# Altium PCB 600V_20A_MotorController_V2.0.PcbDoc (part 1 of 2)
Units mil, origin at the board's own origin, x right, y up, seen from the top; angles counter-clockwise.
Board outline 9360 x 6410 mil, 4 copper layers (Top Layer, GND, VCC, Bottom Layer); 277 components, 153 nets, 1032 pads, 389 vias.
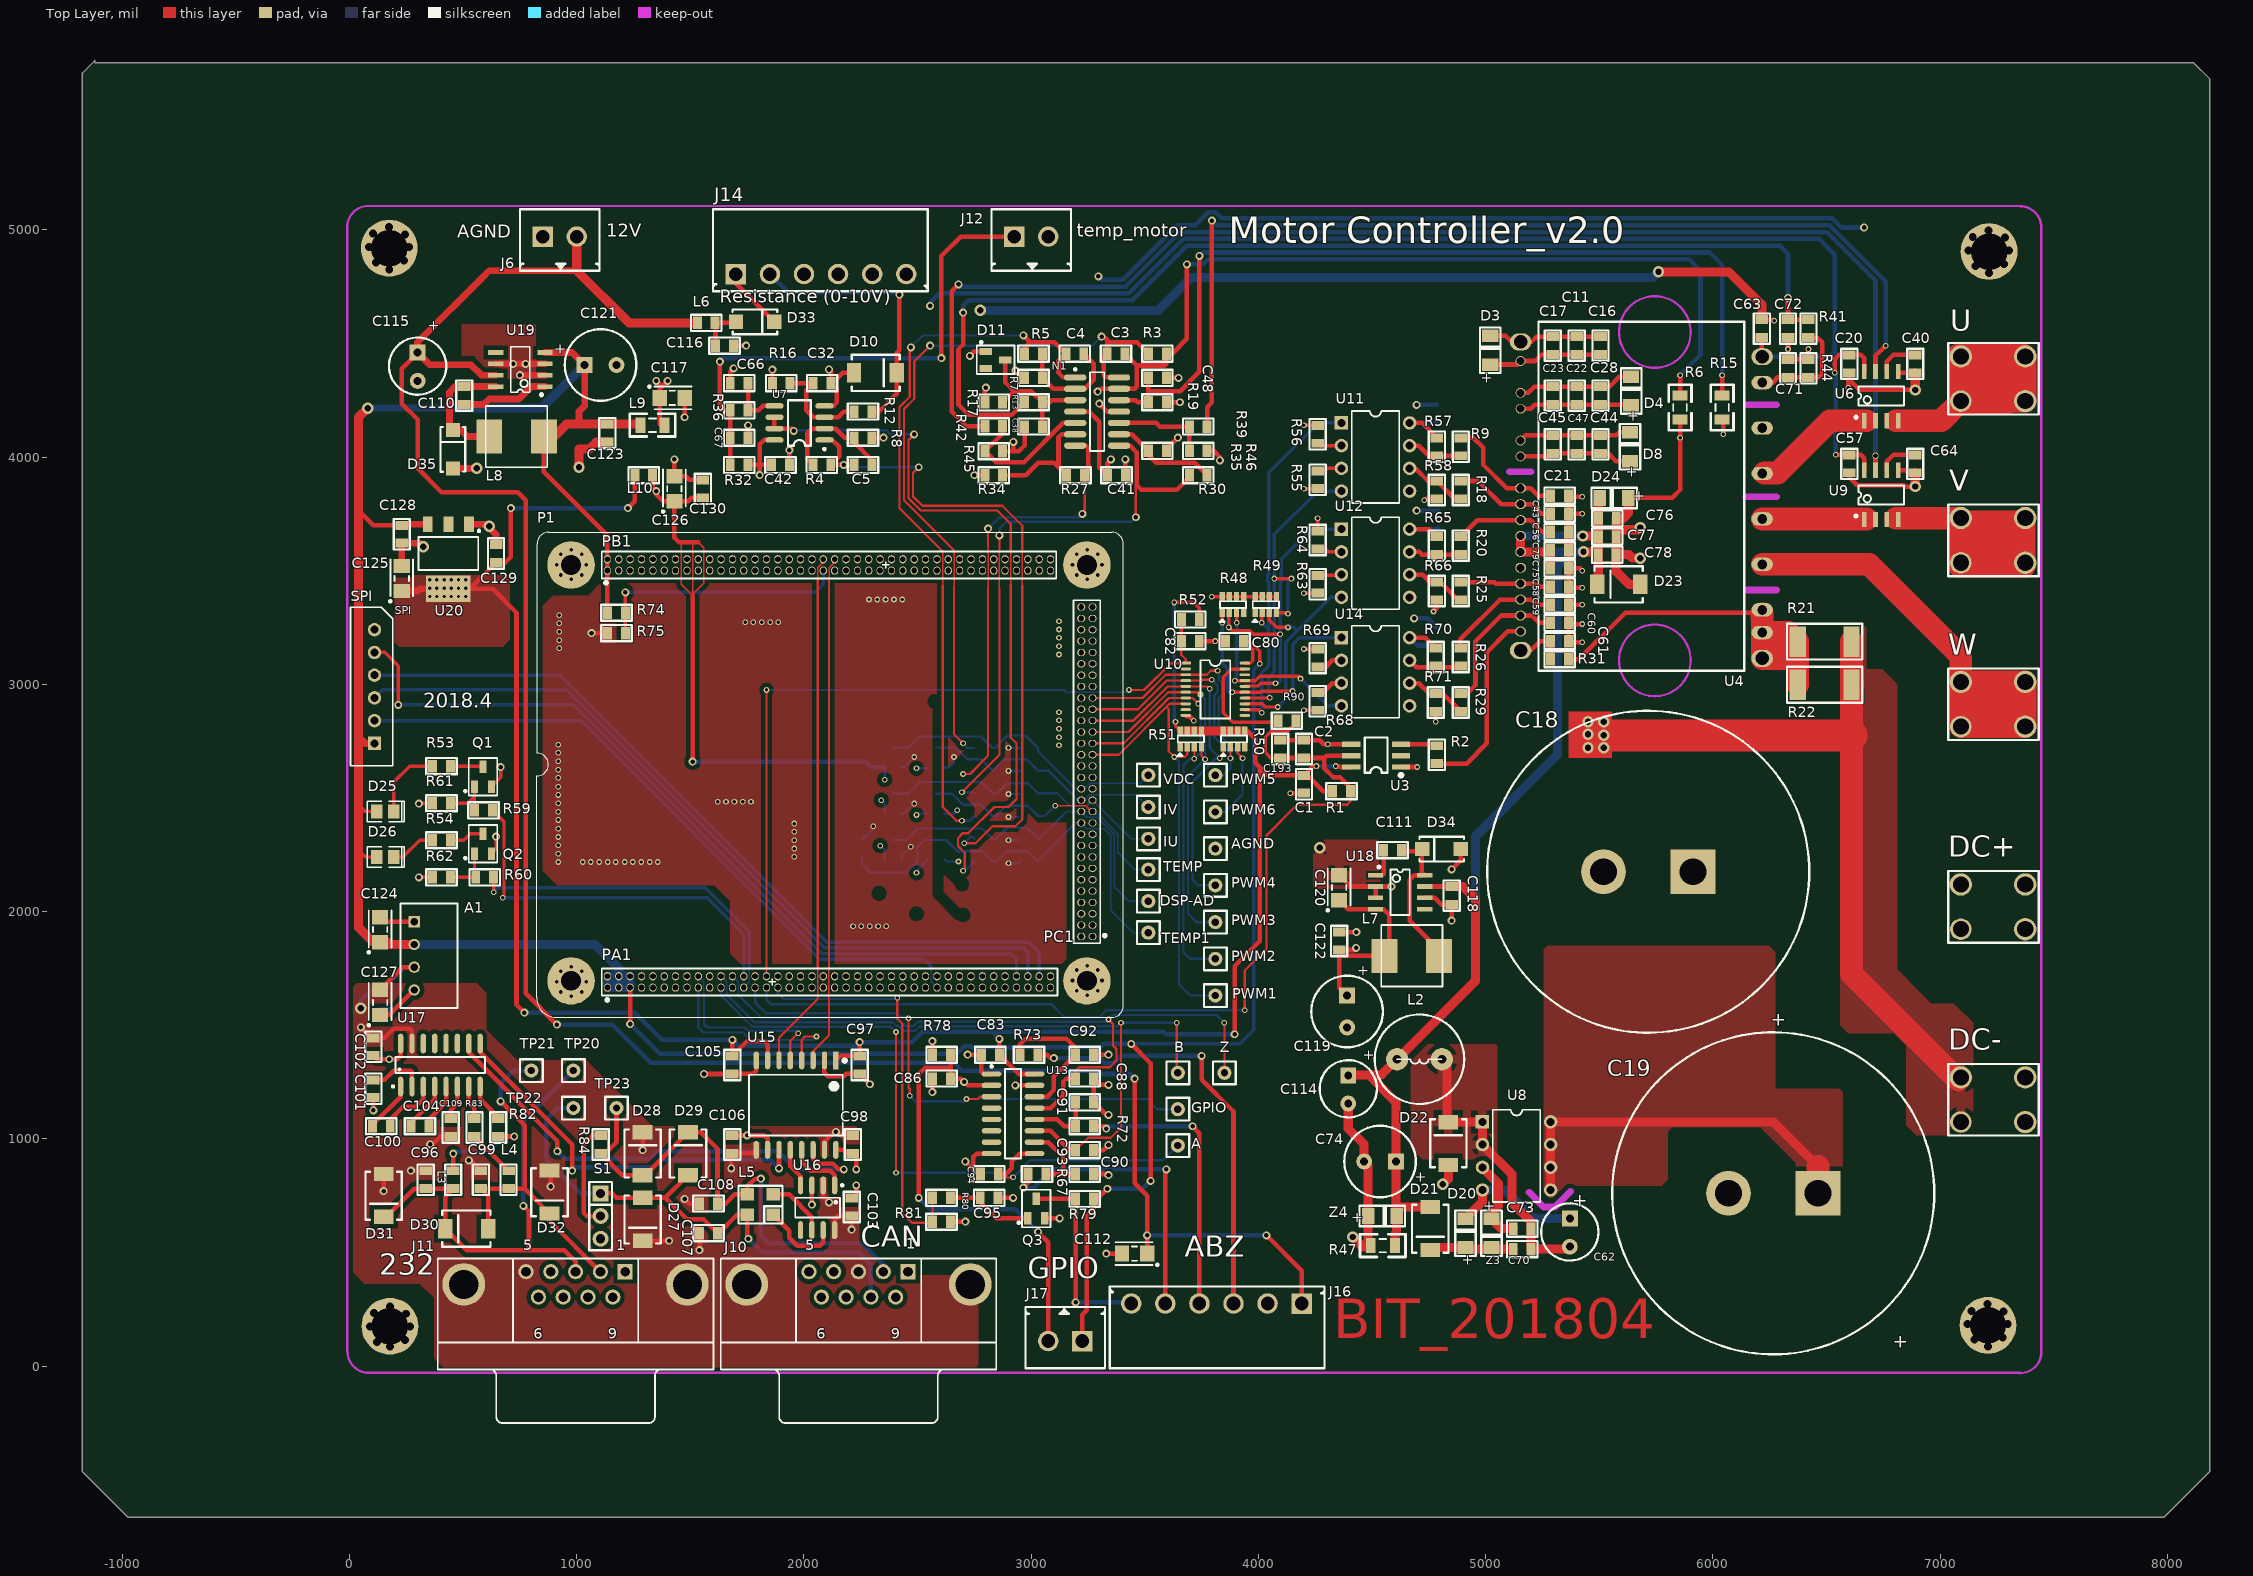
[diagram p0: Top Layer view]
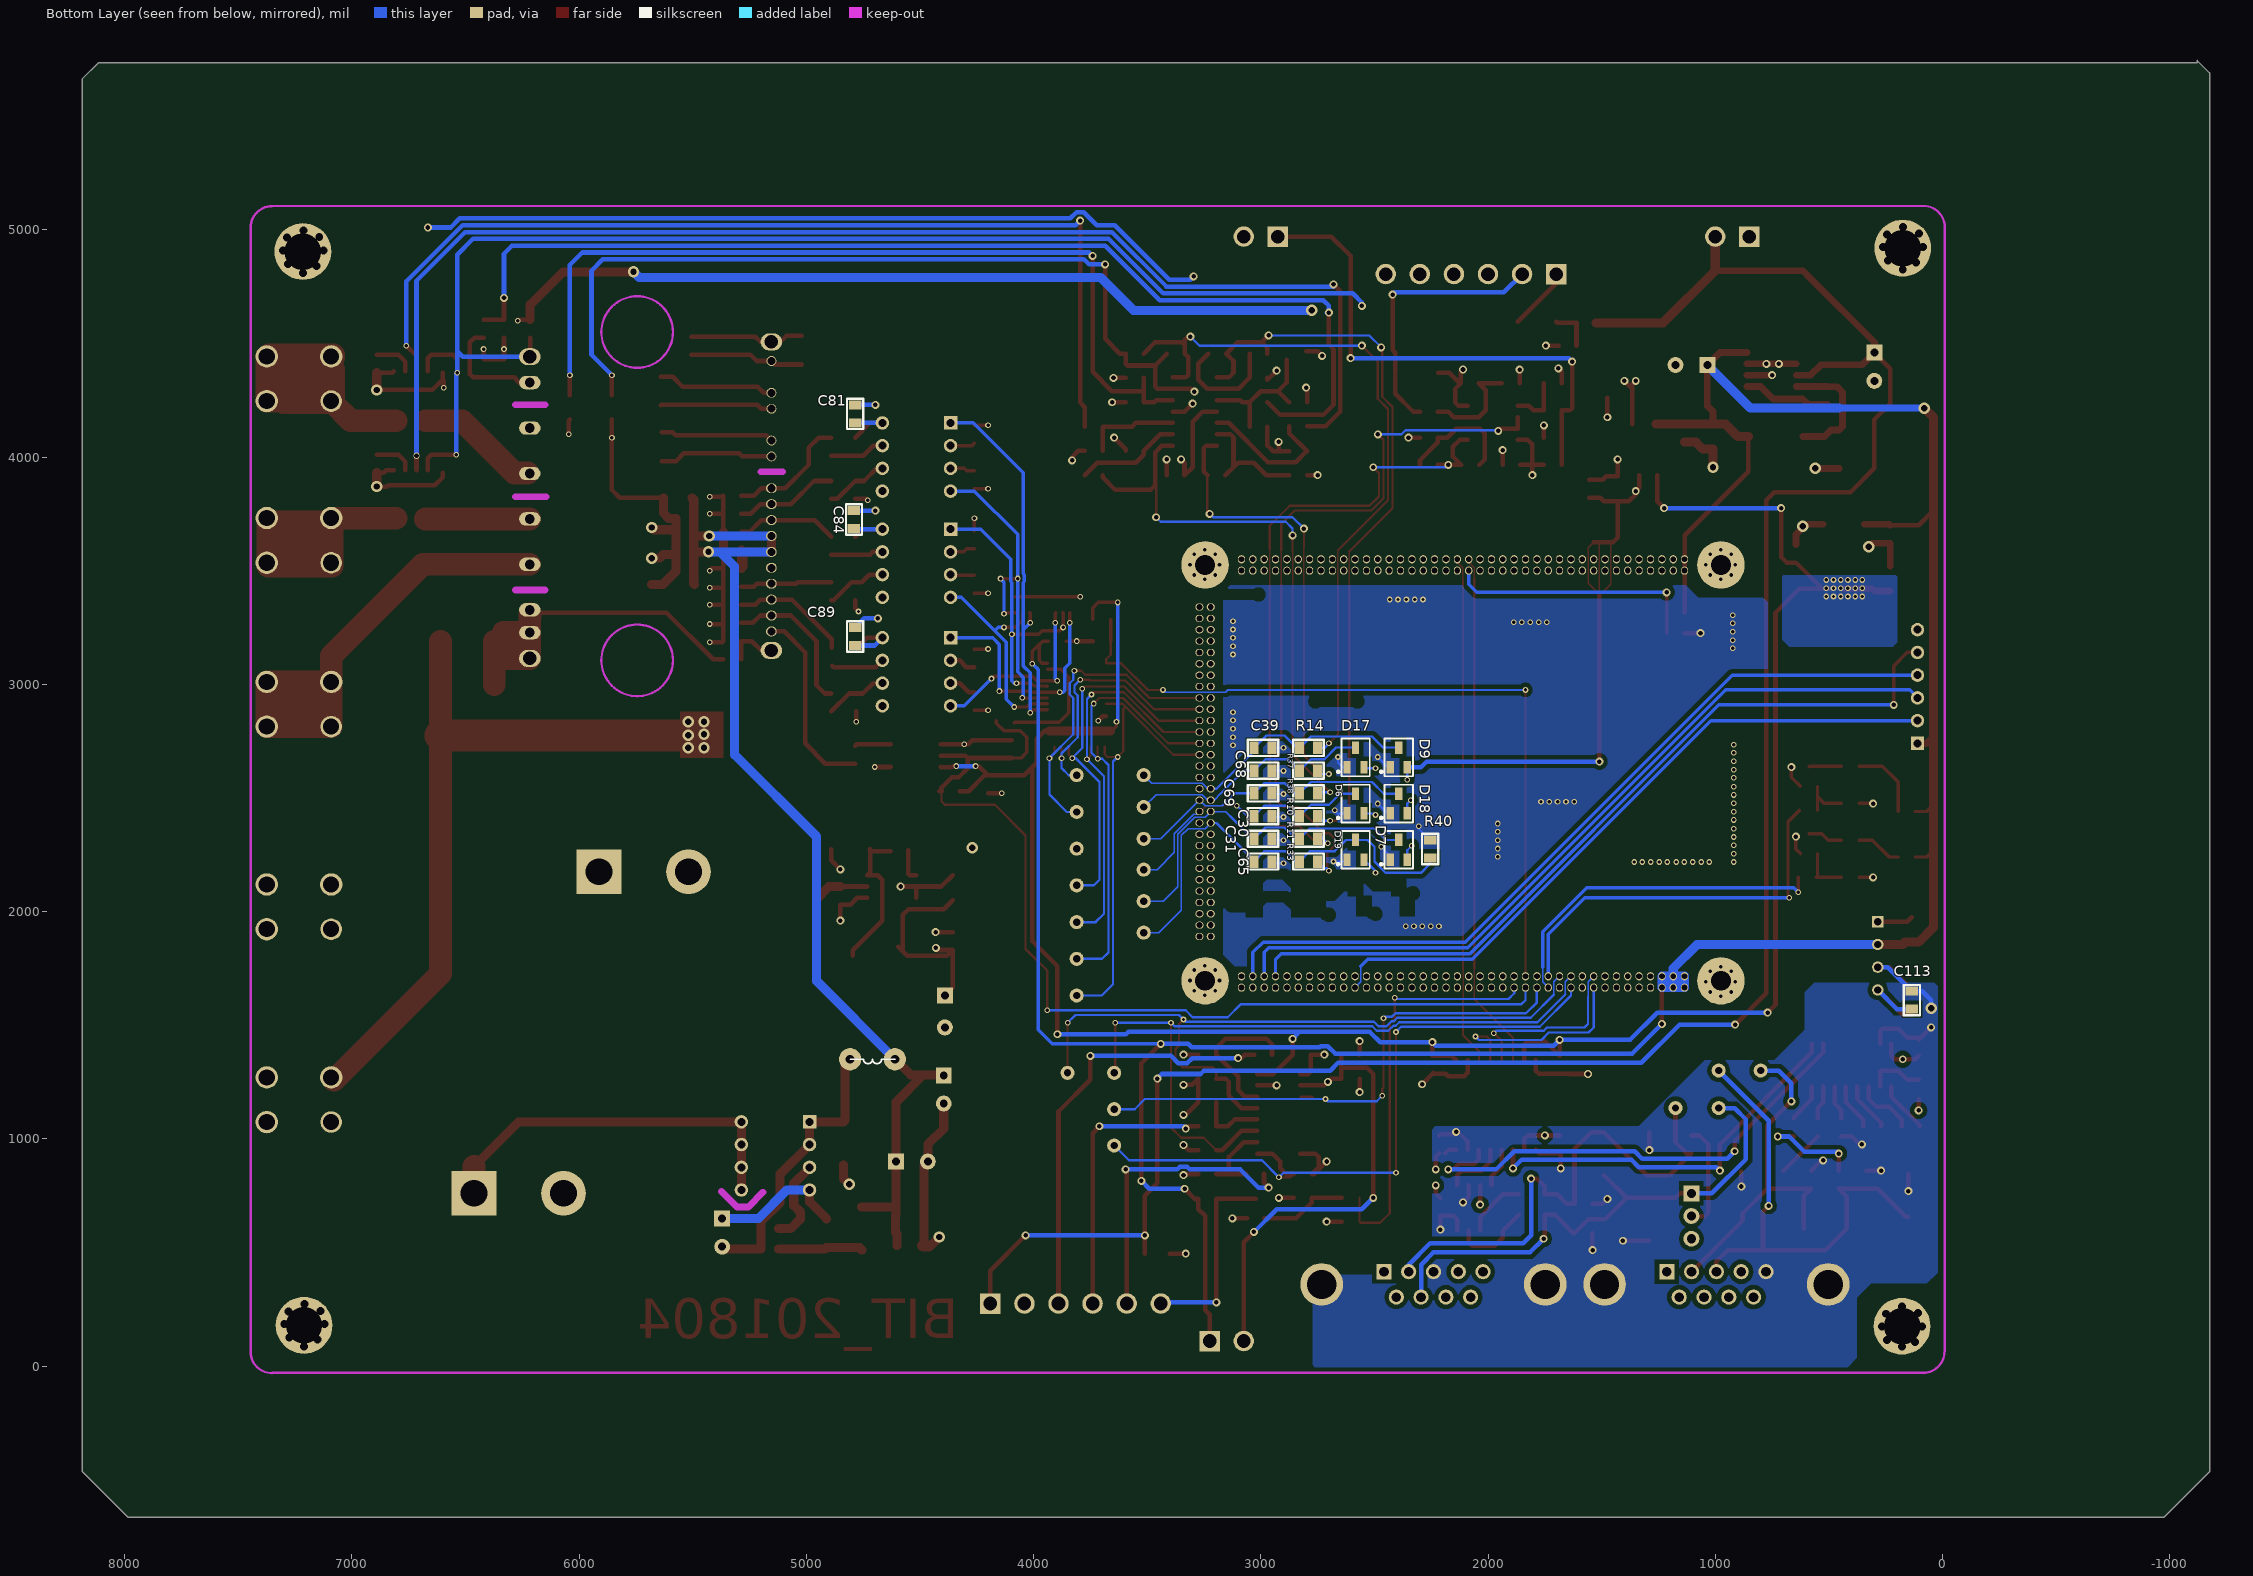
[diagram p1: Bottom Layer view, seen from below]
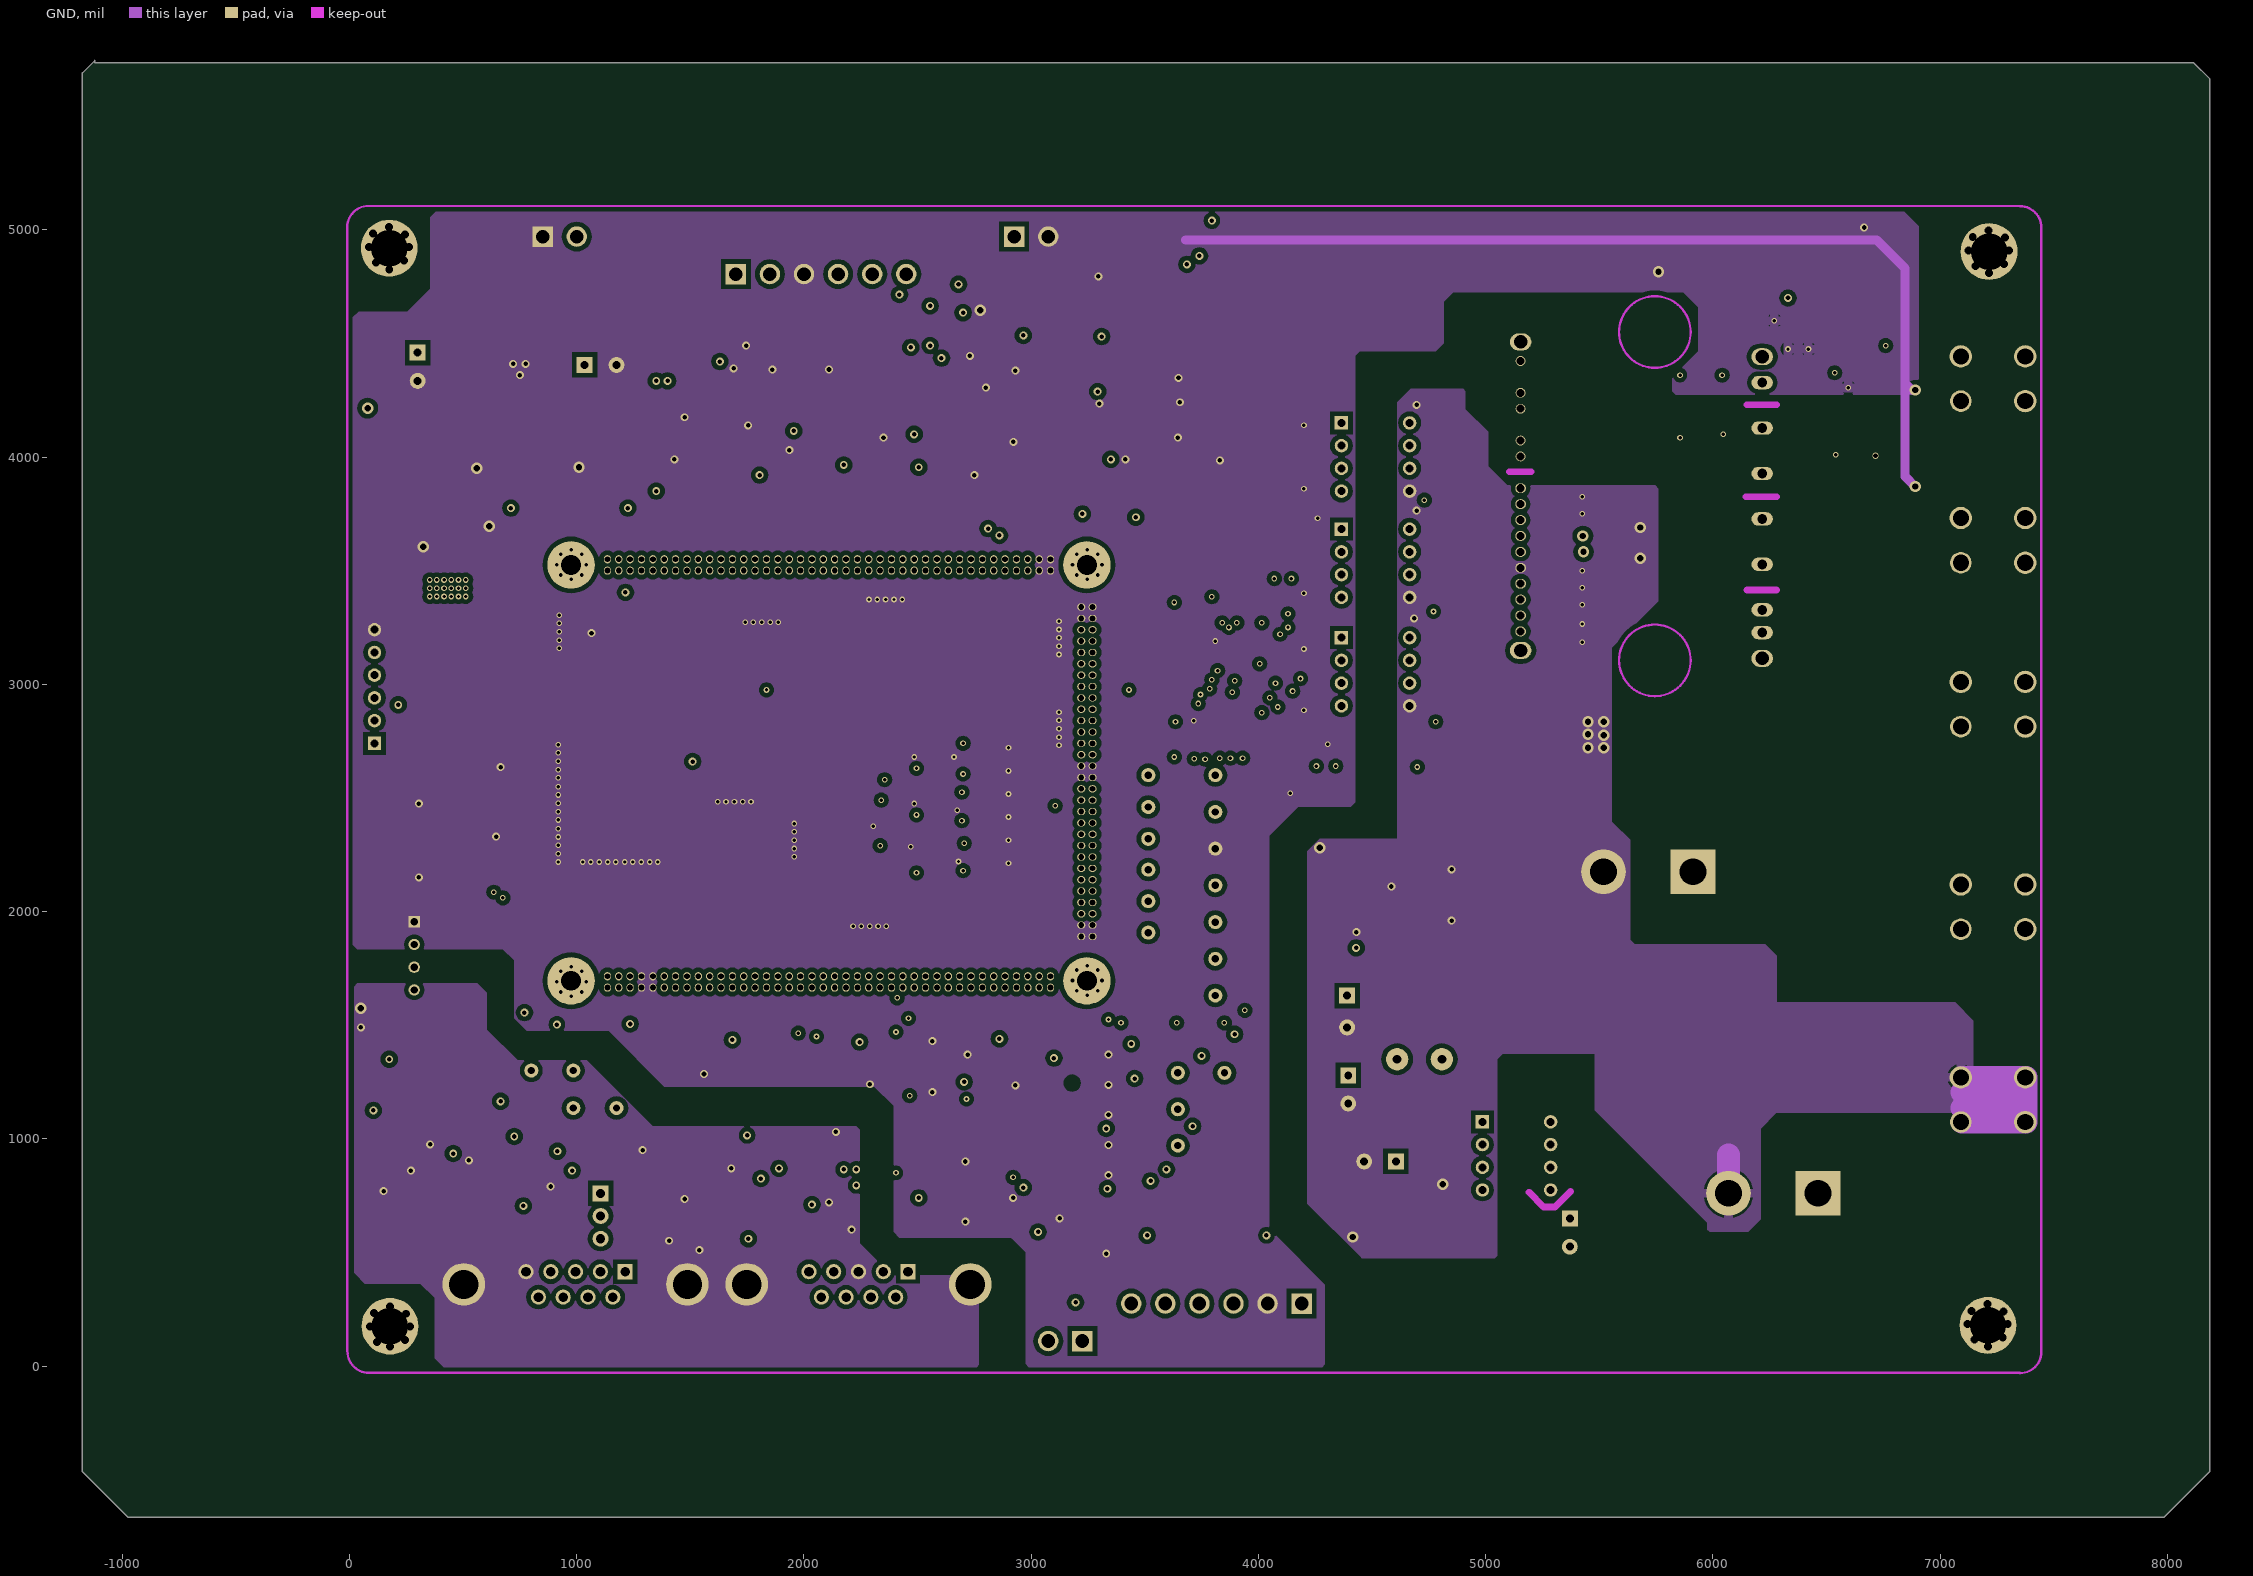
[diagram p2: GND]
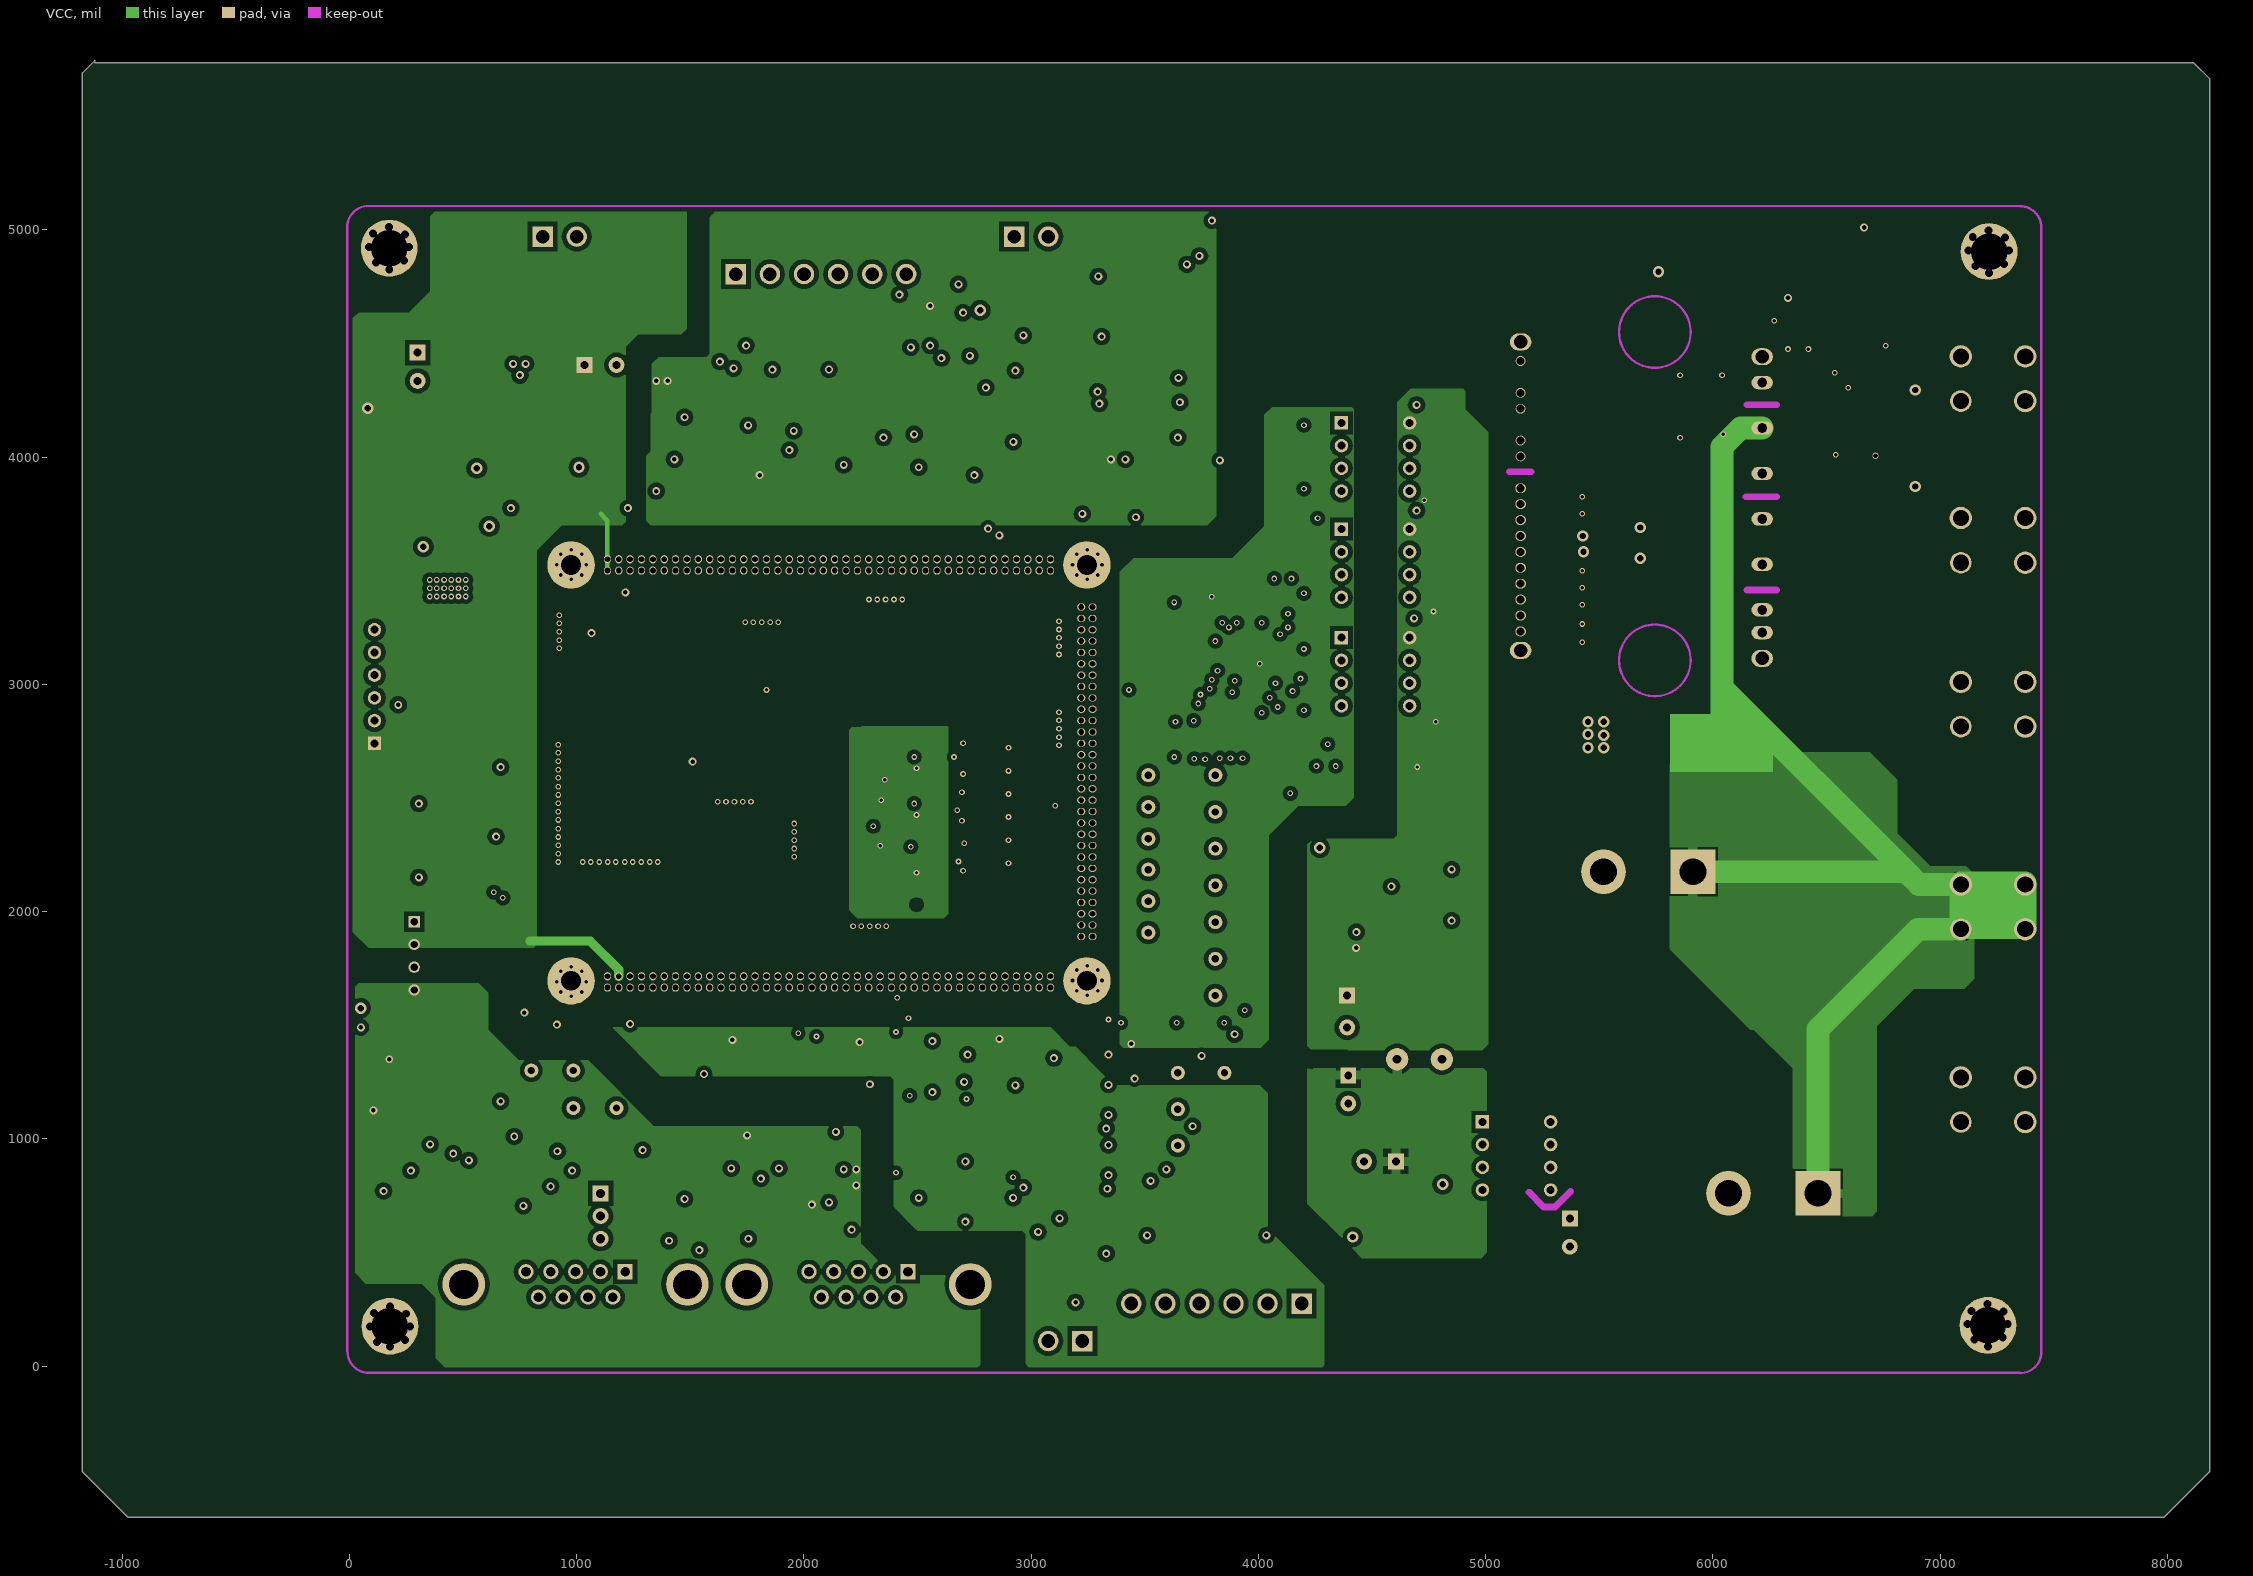
[diagram p3: VCC]

## Layer stack, top to bottom
Top Solder: solder mask 0.4, Solder Resist, Dk 3.5
Top Layer: signal copper 1.4
Dielectric1: core 12.6, FR-4, Dk 4.8
GND: signal copper 1.4
Dielectric2: prepreg 12.6, FR-4, Dk 4.8
VCC: signal copper 1.4
Dielectric3: core 12.6, FR-4, Dk 4.8
Bottom Layer: signal copper 1.4
Bottom Solder: solder mask 0.4, Solder Resist, Dk 3.5

## Board outline
-1120,5735 8115,5735 8185,5665 8185,-465 7985,-665 -975,-665 -1175,-465 -1175,5690 -1120,5745

## Design rules (kind name [scope] priority, off if disabled: settings)
Clearance [All] p1: gap=20 ignorepadtopadclearanceinfootprint=FALSE except(0: Arc-Hole Track-Hole SMDPad-Hole THPad-Hole Via-Hole Fill-Hole Poly-Hole Region-Hole Text-Hole)
ComponentClearance [All] p1: gap=0 collisioncheckmode=3 verticalgap=0 showdistances=FALSE
MinimumSolderMaskSliver [All] p1: minsoldermaskwidth=0
PlaneConnect [All] p1: planeconnectstyle=Relief reliefexpansion=20 reliefentries=4 reliefconductorwidth=40 reliefairgap=10
PolygonConnect [All] p1: connectstyle=Direct reliefconductorwidth=40 reliefentries=4 polygonreliefangle="90 Angle" airgapwidth=10
RoutingVias [All] p1: holewidth=28 width=50 viastyle="Through Hole" minholewidth=28 minwidth=50 maxholewidth=28 maxwidth=50
SilkToSilkClearance [All] p1: silktosilkclearance=0
SilkToSolderMaskClearance SilkscreenOverComponentPads [IsPad] p1: minsilkscreentomaskgap=0 clearancetoexposedcopper=TRUE
SolderMaskExpansion [All] p1: expansion=4 istentingtop=FALSE
Width Width_7 [All] p1 off: maxlimit=30 minlimit=30 preferedwidth=30
Width Width_6 [All] p2 off: maxlimit=30 minlimit=30 preferedwidth=30
Width Width_5 [All] p3 off: maxlimit=100 minlimit=100 preferedwidth=100
Width Width_4 [All] p4 off: maxlimit=20 minlimit=20 preferedwidth=20
Width Width_3 [All] p5 off: maxlimit=106 minlimit=6 preferedwidth=6
Width Width_2 [All] p6: maxlimit=15 minlimit=15 preferedwidth=15
Width Width_1 [All] p7 off: maxlimit=6 minlimit=6 preferedwidth=6
Width [All] p8 off: maxlimit=40 minlimit=40 preferedwidth=40
25 further rules are at their usual default settings.

## Components (designator, comment, footprint, x,y, rotation, side; value= is the part's Value field where it differs from the comment)
A "IV黄色测试点" TP 3645,970 r90 top (schematic designator TP16)
A1 "B0505S-1W" B0505S-1W 435,1955 r270 top
AGND "AGND 黑色测试点" TP 3810,2276.67 r90 top (schematic designator TP17)
B "IV黄色测试点" TP 3645,1290 r90 top (schematic designator TP18)
C1 "Cap" 0805 4200,2560 r90 top
C2 "104" 0805 4200,2715 r270 top
C3 "102" 0805 3373.33,4455 r180 top
C4 "103" 0805 3191.67,4455 r180 top
C5 "103" 0805 2260,3965 r180 top
C11 "225" 0805 5400,4490 r270 top
C16 "225" 0805 5505,4490 r270 top
C17 "104" 0805 5295,4490 r270 top
C18 "390uF/450V" CAP/30mm 5715,2175 r180 top
C19 "390uF/450V" CAP/30mm 6265,760 r180 top
C20 "104" 0805 6600,4410 r90 top
C21 "101" 0805 5325,3830 r180 top
C22 "225" 0805 5400,4270 r270 top
C23 "225" 0805 5295,4270 r270 top
C28 "104" 0805 5505,4270 r270 top
C30 "102" 0805 2990,2420 r0 bottom
C31 "102" 0805 2990,2320 r0 bottom
C32 "103" 0805 2080,4325 r180 top
C38 "103" 0805 3010,4134 r0 top
C39 "103" 0805 2990,2720 r0 bottom
C40 "102" 0805 6890,4410 r90 top
C41 "104" 0805 3375,3920 r180 top
C42 "104" 0805 1896.67,3965 r180 top
C43 "101" 0805 5325,3750 r180 top
C44 "225" 0805 5505,4055.63 r270 top
C45 "225" 0805 5295,4055.63 r270 top
C47 "104" 0805 5400,4055.63 r270 top
C48 "102" 0805 3555,4348 r180 top
C56 "101" 0805 5325,3670 r180 top
C57 "104" 0805 6600,3970 r90 top
C58 "101" 0805 5325,3430 r180 top
C59 "101" 0805 5325,3350 r180 top
C60 "101" 0805 5325,3270 r180 top
C61 "102" 0805 5325,3190 r180 top
C62 "10uF/35V" "CAP/6.4mm -" 5370,690 r270 top
C63 "104" 0805 6215,4565 r270 top
C64 "102" 0805 6890,3970 r90 top
C65 "102" 0805 2990,2220 r0 bottom
C66 "472" 0805 1715,4325 r0 top
C67 "104" 0805 1715,4085 r180 top
C68 "104" 0805 2990,2620 r0 bottom
C69 "104" 0805 2990,2520 r0 bottom
C70 "104" 0805 5160.47,514.53 r180 top
C71 "105" 0805 6330,4390 r270 top
C72 "104" 0805 6330,4565 r90 top
C73 "223" 0805 5160.47,604.53 r180 top
C74 "470uF/25V" CAP/8mm 4635,900 r180 top
C75 "104" 0805 5325,3510 r0 top
C76 "475" 0805 5535,3730 r180 top
C77 "475" 0805 5535,3650 r180 top
C78 "104" 0805 5534.37,3570.71 r180 top
C79 "104" 0805 5325,3590 r180 top
C80 "104" 0805 3895,3190 r180 top
C81 "Cap Semi" 0805 4785,4190 r90 bottom
C82 "104" 0805 3700,3190 r180 top
C83 "104" 0805 2820,1370 r180 top
C84 "Cap Semi" 0805 4790,3725 r90 bottom
C86 "103" 0805 2605.63,1265 r0 top
C88 "102" 0805 3235,1265 r0 top
C89 "Cap Semi" 0805 4785,3210 r90 bottom
C90 "101" 0805 3235,845 r0 top
C91 "101" 0805 3235,1160 r0 top
C92 "101" 0805 3235,1370 r0 top
C93 "102" 0805 3235,950 r0 top
C94 "102" 0805 2815.42,845 r180 top
C95 "104" 0805 2815,740 r0 top
C96 "331" 0805 335,820 r270 top
C97 "104" 0805 2245,1325 r90 top
C98 "104" 0805 2215,975 r90 top
C99 "331" 0805 578.33,820 r270 top
C100 "104" 0805 140,1055 r180 top
C101 "104" 0805 105,1220 r270 top
C102 "104" 0805 105,1405 r90 top
C103 "104" 0805 2210,700 r90 top
C104 "104" 0805 310,1055 r180 top
C105 "104" 0805 1685,1325 r270 top
C106 "104" 0805 1685,975 r90 top
C107 "101" 0805 1580,585 r0 top
C108 "101" 0805 1580,715 r0 top
C109 "104" 0805 445,1050 r270 top
C110 "0.01uF" 0805 505,4270 r270 top
C111 "0.01uF" 0805 4590,2270 r180 top
C112 "10uf 25V 钽电容" "1206 (钽电容)" 3510,495 r180 top
C113 "104" 0805 135,1610 r270 bottom
C114 "100uf 25V 贴片铝电解" "CAP/6.4mm -" 4395,1320 r270 top
C115 "50uf 25V 贴片铝电解" "CAP/6.4mm -" 300,4500 r270 top
C116 "104" 0805 1650,4490 r180 top
C117 "22uf 16V" "1206 (钽电容)" 1365,4260 r0 top
C118 "104" 0805 4850,2070 r90 top
C119 "330uf 16V 铝电解" CAP/8mm 4390,1660 r270 top
C120 "22uf 16V" "1206 (钽电容)" 4355,2050 r90 top
C121 "100uf 16V 铝电解" CAP/8mm 1005,4405 r0 top
C122 "104" 0805 4355,1870 r270 top
C123 "104" 0805 1135,4105 r90 top
C124 "22uf 16V" "1206 (钽电容)" 135,1865 r90 top
C125 "22uf 16V" "1206 (钽电容)" 230,3410 r90 top
C126 "10uf 6.3V" "1206 (钽电容)" 1430,3805 r90 top
C127 "22uf 16V" "1206 (钽电容)" 135,1545 r90 top
C128 "104" 0805 230,3660 r90 top
C129 "104" 0805 645,3575 r270 top
C130 "104" 0805 1555,3860 r270 top
C193 "104" 0805 4095,2715 r270 top
D3 "ZM4746A" LL4148 5020,4470 r90 top
D4 "ZM4746A" LL4148 5640,4290 r90 top
D6 "BAR43S" SOT-23 2620,2431.67 r180 bottom
D7 "BAR43S" SOT-23 2430,2228.33 r180 bottom
D8 "ZM4746A" LL4148 5635,4045 r90 top
D9 "BAR43S" SOT-23 2430,2635 r180 bottom
D10 "SMBJ12A" DO214AA 2220,4370 r0 top
D11 "MMBZ5226B" SOT-23 2800,4465 r270 top
D17 "BAR43S" SOT-23 2620,2635 r180 bottom
D18 "BAR43S" SOT-23 2430,2431.67 r180 bottom
D19 "BAR43S" SOT-23 2620,2228.33 r180 bottom
D20 "1N4148" LL4148 4910.47,584.53 r90 top
D21 "MURS220T3" DO214AA 4755.47,699.53 r270 top
D22 "MURS220T3" DO214AA 4835.47,884.53 r90 top
D23 "MURS220T3" DO214AA 5680,3440 r180 top
D24 "ZM4746A" LL4148 5565,3820 r180 top
D25 "LEDRED" L0805 120,2440 r180 top
D26 "LEDGREEN" L0805 120,2240 r180 top
D27 "P6KE5.0CA" DO214AA 1290,740 r270 top
D28 "P6KE5.0CA" DO214AA 1290,840 r90 top
D29 "P6KE6.8CA" DO214AA 1490,840 r90 top
D30 "P6KE24CA" DO214AA 610,605 r180 top
D31 "P6KE15CA" DO214AA 150,845 r270 top
D32 "P6KE15CA" DO214AA 880,860 r270 top
D33 "U2D" DO214AC 1700,4595 r0 top
D34 "1N5819 SS14" DO214AC 4890,2275 r180 top
D35 "1N5819 SS14" DO214AC 455,3950 r90 top
DC+ "Header 2" PCB焊接端子 7370,2138.75 r270 top (schematic designator J3)
DC- "Header 2" PCB焊接端子 7370,1290 r270 top (schematic designator J7)
DSP-AD "IV黄色测试点" TP 3515,2045.71 r0 top (schematic designator TP2)
GPIO "IV黄色测试点" TP 3645,1130 r180 top (schematic designator TP13)
IU "IV黄色测试点" TP 3515,2320 r90 top (schematic designator TP6)
IV "IV黄色测试点" TP 3515,2460 r90 top (schematic designator TP5)
J6 "Header 2" 381S-2 850,4970 r0 top
J10 "D Connector 9" DSUB1.385-2H9 2240,-15 r180 top
J11 "D Connector 9" DSUB1.385-2H9 995,-15 r180 top
J12 "Header 2" 381S-2 2925,4970 r0 top
J14 "6 P2.54黑色插针" 381S-6 1700,4880 r0 top
J16 "Header 6" 381S-6 4190,200 r180 top
J17 "Header 2" 381S-2 3225,110 r180 top
L2 "2.2mH工字/3A" L\5\10 4610,1350 r0 top
L3 "MMZ2012R601A" 0805 456.67,820 r90 top
L4 "MMZ2012R601A" 0805 700,820 r90 top
L5 "ACM3225-102-2P" ACM3225 1865,665 r180 top
L6 "BLM21PG221SH1" 0805 1570,4590 r0 top
L7 "330uh" L_7*7 4675,1805 r180 top
L8 "47uh" L_7*7 735,4090 r0 top
L9 "CIB31P310NE" 1206 1280,4140 r0 top
L10 "BLM21PG221SH1" 0805 1295,3920 r0 top
N1 "MCP6024" SOIC14_M 3290,4200 r0 top
P1 "CPU_DSP" DSP_240 3795,1895 r90 top
PWM1 "IV黄色测试点" TP 3810,1630 r180 top (schematic designator TP12)
PWM2 "IV黄色测试点" TP 3810,1791.67 r180 top (schematic designator TP11)
PWM3 "IV黄色测试点" TP 3810,1953.33 r180 top (schematic designator TP10)
PWM4 "IV黄色测试点" TP 3810,2115 r180 top (schematic designator TP9)
PWM5 "IV黄色测试点" TP 3810,2600 r180 top (schematic designator TP8)
PWM6 "IV黄色测试点" TP 3810,2438.33 r90 top (schematic designator TP7)
Q1 "FMMT618TA" SOT-23 550,2550 r0 top
Q2 "FMMT618TA" SOT-23 550,2255 r0 top
Q3 "FMMT618TA" SOT-23 2985,650 r0 top
R1 "681" 0805 4365,2530 r180 top
R2 "681" 0805 4785,2690 r90 top
R3 "1002" 0805 3555,4455 r180 top
R4 "30K" 0805 2078.33,3965 r180 top
R5 "10k" 0805 3010,4455 r0 top
R6 "2004" 1206 5855,4165 r90 top
R7 "10K" 0805 3010,4348 r180 top
R8 "120K" 0805 2260,4085 r0 top
R9 "100R" 0805 4890,4045 r90 top
R10 "470R" 0805 2790,2420 r180 bottom
R11 "100R" 0805 2790,2320 r180 bottom
R12 "120K" 0805 2260,4200 r180 top
R13 "10K" 0805 3010,4241 r0 top
R14 "1k" 0805 2790,2720 r0 bottom
R15 "2004" 1206 6040,4165 r90 top
R16 "30K" 0805 1900,4325 r180 top
R17 "10K" 0805 2835,4240 r180 top
R18 "100R" 0805 4890,3855 r90 top
R19 "1002" 0805 3555,4241 r180 top
R20 "100R" 0805 4890,3610 r90 top
R21 "8mR" 2512 6495,3175 r180 top
R22 "8mR" 2512 6495,2985 r180 top
R25 "100R" 0805 4890,3410 r90 top
R26 "100R" 0805 4890,3120 r90 top
R27 "12k" 0805 3195,3920 r180 top
R29 "100R" 0805 4890,2920 r90 top
R30 "12k" 0805 3735,3920 r0 top
R31 "2k" 0805 5325,3110 r0 top
R32 "4.7K" 0805 1715,3965 r180 top
R33 "470R" 0805 2790,2220 r0 bottom
R34 "20K" 0805 2835,3920 r180 top
R35 "20K" 0805 3555,4027 r0 top
R36 "3.3K" 0805 1715,4205 r0 top
R37 "100R" 0805 2790,2620 r180 bottom
R38 "100R" 0805 2790,2520 r180 bottom
R39 "20K" 0805 3735,4134 r180 top
R40 "470R" 0805 2255,2275 r270 bottom
R41 "1k" 0805 6420,4565 r90 top
R42 "20K" 0805 2835,4135 r0 top
R44 "5.1k" 0805 6420,4390 r270 top
R45 "12K" 0805 2835,4025 r0 top
R46 "12K" 0805 3735,4027 r0 top
R47 "2K" 1206 4600,530 r180 top
R48 "20K(0603*4)" R_NET4 3840,3315 r0 top
R49 "20K(0603*4)" R_NET4 3985,3315 r0 top
R50 "20K(0603*4)" R_NET4 3845,2725 r0 top
R51 "20K(0603*4)" R_NET4 3655,2725 r0 top
R52 "10K" 0805 3700,3285 r0 top
R53 "301R" 0805 405,2640 r180 top
R54 "301R" 0805 405,2313.33 r180 top
R55 "470R" 0805 4260,3900 r270 top
R56 "470R" 0805 4260,4100 r90 top
R57 "750R" 0805 4785,4045 r90 top
R58 "750R" 0805 4785,3855 r270 top
R59 "10K" 0805 590,2445 r0 top
R60 "10K" 0805 595,2150 r0 top
R61 "2K" 0805 405,2476.67 r180 top
R62 "2K" 0805 405,2150 r180 top
R63 "470R" 0805 4260,3440 r270 top
R64 "470R" 0805 4260,3635 r90 top
R65 "750R" 0805 4785,3610 r90 top
R66 "750R" 0805 4785,3410 r270 top
R67 "1K" 0805 3025.21,845 r0 top
R68 "470R" 0805 4260,2925 r270 top
R69 "470R" 0805 4260,3115 r90 top
R70 "750R" 0805 4780,3120 r90 top
R71 "750R" 0805 4780,2920 r270 top
R72 "1K" 0805 3235,1055 r180 top
R73 "1K" 0805 2990,1370 r180 top
R74 "1.69K" 0805 1175,3315 r180 top
R75 "3,.3K" 0805 1175,3225 r0 top
R78 "1K" 0805 2605.63,1370 r0 top
R79 "2.2K" 0805 3235,735 r0 top
R80 "1K" 0805 2605,740 r180 top
R81 "10K" 0805 2605,635 r0 top
R82 "100R" 0805 655,1050 r270 top
R83 "100R" 0805 550,1050 r270 top
R84 "120R" 0805 1105,975 r90 top
R90 "0R" 0805 4125,2840 r180 top
S1 "2.54排针黑色3P" SIP3 1105,760 r270 top
SPI "6 P2.54黑色插针" "6P 100mil" 110,2990 r270 top (schematic designator J15)
TEMP "IV黄色测试点" TP 3515,2184.29 r0 top (schematic designator TP1)
TEMP1 "IV黄色测试点" TP 3515,1907.14 r0 top (schematic designator TP4)
TP20 "IV黄色测试点" TP 985,1300 r270 top
TP21 "IV黄色测试点" TP 800,1300 r270 top
TP22 "IV黄色测试点" TP 985,1135 r270 top
TP23 "IV黄色测试点" TP 1175,1135 r270 top
U "Header 2" PCB焊接端子 7370,4462.5 r270 top (schematic designator J1)
U3 "TLP117" TLP113 4515,2685 r180 top
U4 "FNC42060F" FNC42060F 5685,3810 r180 top
U6 "ACS712" SOIC-8 6665,4160 r90 top
U7 "LMV358" so-8 2090,4075 r180 top
U8 "VIPER22A" DIP8 5135.47,924.53 r270 top
U9 "ACS712" SOIC-8 6665,3725 r90 top
U10 "SN74ABT541BPW" TSSOP-20 3655,3110 r0 top
U11 "HCPL-2630" DIP8 4515,4000 r270 top
U12 "HCPL-2630" DIP8 4515,3532.5 r270 top
U13 "SN74HC365D" D016_N 2920,1110 r0 top
U14 "HCPL-2630" DIP8 4515,3055 r270 top
U15 "ISO7242CDW" SOIC16_L 2140,1345 r270 top
U16 "TJA1050" sot96-1_n 2135,795 r270 top
U17 "MAX232ESE" NSO16_N 225,1230 r90 top
U18 "LM2675" SOIC-8 4515,2160 r0 top
U19 "LM2675" SOIC-8 860,4310 r180 top
U20 "ams1117-3.3" SOT-223 435,3575 r180 top
V "Header 2" PCB焊接端子 7370,3751.25 r270 top (schematic designator J4)
VDC "IV黄色测试点" TP 3515,2600 r0 top (schematic designator TP3)
W "Header 2" PCB焊接端子 7370,3030 r270 top (schematic designator J8)
Z "IV黄色测试点" TP 3850,1290 r90 top (schematic designator TP19)
Z3 "15V -ZM4744" LL4148 5025.47,584.53 r270 top
Z4 "15V-ZM4744" LL4148 4545,660 r0 top

## Footprints (in the part's own frame and the unit in brackets; to place one, negate y for a bottom-side part, rotate by r counter-clockwise, add the part's x,y. Pads: shape width x height; smd on the part's side, far side on the other; paste and mask are expansions set on the pad)
"6P 100mil" [mm]
  rect 1.5x1.5 hole 0.9: 1(6.35,0)
  round 1.5 hole 0.9: 2(3.81,0) 3(1.27,0) 4(-1.27,0) 5(-3.81,0) 6(-6.35,0)
  silkscreen extent -8.86,-2.69 8.86,2.03
381S-2 [mil]
  rect 90x90 hole 60: 1(0,0)
  round 90 hole 60: 2(150,0)
  silkscreen extent -100,-150 250,120
381S-6 [mil]
  rect 90x90 hole 60: 1(0,-75)
  round 90 hole 60: 2(150,-75) 3(300,-75) 4(450,-75) 5(600,-75) 6(750,-75)
  silkscreen extent -100,-150 845,210
0805 [mm]
  rect 1x1.4 smd: 1(-1,0) 2(1,0)
  silkscreen extent -1.7,-0.9 1.7,0.9
1206 [mm]
  rect 1.1x1.7 smd: 1(0,0) 2(2.7,0)
  silkscreen extent -1.19,-1.27 3.89,1.27, body extent -0.35,-0.9 3.05,0.9, height 1.3
"1206 (钽电容)" [mm]
  rect 1.6x1.8 smd: 1(0,0) 2(2.8,0)
  silkscreen extent -1.27,-1.27 3.56,1.39
2512 [mm]
  rect 1.8x3.4 smd: 1(-2.903,-0.324) 2(3.097,-0.324)
  silkscreen extent -4.1,-2.32 4.3,1.68
ACM3225 [mm]
  rect 1.5x1.4 smd: 1(0,0) 2(0,-2.3) 3(2.9,-2.3) 4(2.9,0)
  silkscreen extent -1.02,-3.25 3.9,0.96
B0505S-1W [mil]
  round 50 hole 32: 1(100,-150) 4(200,-150) 6(300,-150)
  rect 50x50 hole 32: 2(0,-150)
  silkscreen extent -80,-210 380,40
"CAP/6.4mm -" [mil]
  rect 70x70 hole 35: 1(41,0)
  round 70 hole 35: 2(165,0)
  silkscreen extent -26,-126 226,126
CAP/8mm [mil]
  rect 70x70 hole 35: 1(30,0)
  round 70 hole 35: 2(170,0)
  silkscreen extent -57,-157 257,157
CAP/30mm [mm]
  rect 5x5 hole 3: 1(-5,0)
  round 5 hole 3: 2(5,0)
  silkscreen extent -18,-18 18,18
D016_N [mm] "SOIC, 16-Leads, Body 9.9x3.9"
  oval 2.2x0.6 smd: 1(-2.4,4.445) 2(-2.4,3.175) 3(-2.4,1.905) 4(-2.4,0.635) 5(-2.4,-0.635) 6(-2.4,-1.905) 7(-2.4,-3.175) 8(-2.4,-4.445) 9(2.4,-4.445) 10(2.4,-3.175) 11(2.4,-1.905) 12(2.4,-0.635) 13(2.4,0.635) 14(2.4,1.905) 15(2.4,3.175) 16(2.4,4.445)
  silkscreen extent -2.52,-5 0.9,5.42
DIP8 [mm] "DIP; 8 Leads; Row Spacing 7.62 mm; Pitch 2.54 mm"
  rect 1.5x1.5 hole 0.9: 1(-3.81,-3.81)
  round 1.5 hole 0.9: 2(-1.27,-3.81) 3(1.27,-3.81) 4(3.81,-3.81) 5(3.81,3.81) 6(1.27,3.81) 7(-1.27,3.81) 8(-3.81,3.81)
  silkscreen extent -5.15,-2.65 5.15,2.65
DO214AA [mm]
  rect 1.6x2.2 smd: 1(-0.007,0.007) 2(4.793,0.007)
  silkscreen extent -0.26,-2.03 5.11,2.04
DO214AC [mil]
  rect 62x62 smd: 1(-0.04,0.18) 2(169.26,0.18)
  silkscreen extent -15,-54 182,55
DSP_240 [mil]
  oval 36x31.5 hole 25.59: 1(-230,2660) 2(-180,2660) 3(-230,2610) 4(-180,2610) 5(-230,2560) 6(-180,2560) 7(-230,2510) 8(-180,2510) 9(-230,2460) 10(-180,2460) 11(-230,2410) 12(-180,2410) 13(-230,2360) 14(-180,2360) 15(-230,2310) 16(-180,2310) 17(-230,2260) 18(-180,2260) 19(-230,2210) 20(-180,2210) 21(-230,2160) 22(-180,2160) 23(-230,2110) 24(-180,2110) 25(-230,2060) 26(-180,2060) 27(-230,2010) 28(-180,2010) 29(-230,1960) 30(-180,1960) 31(-230,1910) 32(-180,1910) 33(-230,1860) 34(-180,1860) 35(-230,1810) 36(-180,1810) 37(-230,1760) 38(-180,1760) 39(-230,1710) 40(-180,1710) 41(-230,1660) 42(-180,1660) 43(-230,1610) 44(-180,1610) 45(-230,1560) 46(-180,1560) 47(-230,1510) 48(-180,1510) 49(-230,1460) 50(-180,1460) 51(-230,1410) 52(-180,1410) 53(-230,1360) 54(-180,1360) 55(-230,1310) 56(-180,1310) 57(-230,1260) 58(-180,1260) 59(-230,1210) 60(-180,1210) 61(-230,1160) 62(-180,1160) 63(-230,1110) 64(-180,1110) 65(-230,1060) 66(-180,1060) 67(-230,1010) 68(-180,1010) 69(-230,960) 70(-180,960) 71(-230,910) 72(-180,910) 73(-230,860) 74(-180,860) 75(-230,810) 76(-180,810) 77(-230,760) 78(-180,760) 79(-230,710) 80(-180,710) 81(1605,2660) 82(1655,2660) 83(1605,2610) 84(1655,2610) 85(1605,2560) 86(1655,2560) 87(1605,2510) 88(1655,2510) 89(1605,2460) 90(1655,2460) 91(1605,2410) 92(1655,2410) 93(1605,2360) 94(1655,2360) 95(1605,2310) 96(1655,2310) 97(1605,2260) 98(1655,2260) 99(1605,2210) 100(1655,2210) 101(1605,2160) 102(1655,2160) 103(1605,2110) 104(1655,2110) 105(1605,2060) 106(1655,2060) 107(1605,2010) 108(1655,2010) 109(1605,1960) 110(1655,1960) 111(1605,1910) 112(1655,1910) 113(1605,1860) 114(1655,1860) 115(1605,1810) 116(1655,1810) 117(1605,1760) 118(1655,1760) 119(1605,1710) 120(1655,1710) 121(1605,1660) 122(1655,1660) 123(1605,1610) 124(1655,1610) 125(1605,1560) 126(1655,1560) 127(1605,1510) 128(1655,1510) 129(1605,1460) 130(1655,1460) 131(1605,1410) 132(1655,1410) 133(1605,1360) 134(1655,1360) 135(1605,1310) 136(1655,1310) 137(1605,1260) 138(1655,1260) 139(1605,1210) 140(1655,1210) 141(1605,1160) 142(1655,1160) 143(1605,1110) 144(1655,1110) 145(1605,1060) 146(1655,1060) 147(1605,1010) 148(1655,1010) 149(1605,960) 150(1655,960) 151(1605,910) 152(1655,910) 153(1605,860) 154(1655,860) 155(1605,810) 156(1655,810) 157(1605,760) 158(1655,760) 159(1605,710) 160(1655,710)
  oval 31.5x36 hole 25.59: 161(-5,525) 162(-5,575) 163(45,525) 164(45,575) 165(95,525) 166(95,575) 167(145,525) 168(145,575) 169(195,525) 170(195,575) 171(245,525) 172(245,575) 173(295,525) 174(295,575) 175(345,525) 176(345,575) 177(395,525) 178(395,575) 179(445,525) 180(445,575) 181(495,525) 182(495,575) 183(545,525) 184(545,575) 185(595,525) 186(595,575) 187(645,525) 188(645,575) 189(695,525) 190(695,575) 191(745,525) 192(745,575) 193(795,525) 194(795,575) 195(845,525) 196(845,575) 197(895,525) 198(895,575) 199(945,525) 200(945,575) 201(995,525) 202(995,575) 203(1045,525) 204(1045,575) 205(1095,525) 206(1095,575) 207(1145,525) 208(1145,575) 209(1195,525) 210(1195,575) 211(1245,525) 212(1245,575) 213(1295,525) 214(1295,575) 215(1345,525) 216(1345,575) 217(1395,525) 218(1395,575) 219(1445,525) 220(1445,575)
  round 208.66 hole 86.61: 261(-200,2820) 262(-200,550) 263(1630,550) 264(1630,2820)
  silkscreen extent -361,390 1774,2971
DSUB1.385-2H9 [mm] "Connector; D Subminiature; 9 Position; Right Angle; Pitch 1.385 mm"
  rect 1.69x1.69 hole 1.09: 1(-5.54,-10.92)
  round 1.69 hole 1.09: 2(-2.77,-10.92) 3(0,-10.92) 4(2.77,-10.92) 5(5.54,-10.92) 6(-4.155,-8.08) 7(-1.385,-8.08) 8(1.385,-8.08) 9(4.155,-8.08)
  round 4.76 hole 3.26: 10(-12.495,-9.5) 11(12.495,-9.5)
  silkscreen extent -15.4,-12.4 15.4,6
FNC42060F [mm]
  oval 2.4x1.9 hole 1.5: 1(-13.5,-16.034) 9(-13.5,17.686) 10(13.5,16.797) 26(13.5,-17.685)
  oval 2.4x1.5 hole 1.1: 2(-13.5,-13.144) 3(-13.5,-8.065) 4(-13.5,-2.985) 5(-13.5,2.095) 6(-13.5,7.175) 7(-13.5,12.256) 8(-13.5,14.795)
  oval 1.2x1.1 hole 0.9: 11(13.5,14.669) 12(13.5,12.891) 13(13.5,11.113) 14(13.5,9.335) 15(13.5,7.556) 16(13.5,5.779) 17(13.5,4.001) 18(13.5,2.223) 19(13.5,0.444) 20(13.5,-1.333)
  round 1.1 hole 0.9: 21(13.5,-4.889) 22(13.5,-6.668) 23(13.5,-10.223) 24(13.5,-12.001) 25(13.5,-15.557)
  Keep-Out Layer circle w0.254: c-1.5,17.906 r4
  Keep-Out Layer circle w0.254: c-1.5,-18.795 r4
  silkscreen extent -11.5,-19.94 11.5,19.06
L0805 [mm]
  rect 1.3x1.6 smd: 1(0,0) 2(-1.9,0)
  silkscreen extent -3.08,-1.15 1.05,1.15
L\5\10 [mm]
  round 2.5 hole 1: 1(5,0) 2(0,0)
  silkscreen extent -2.5,-5 7.5,5
L_7*7 [mm]
  rect 2.9x3.8 smd: 1(-3.048,0) 2(3.048,0)
  silkscreen extent -3.43,-3.43 3.43,3.43
LL4148 [mm]
  rect 1.4x1.8 smd: 1(-1.6,0) 2(1.6,0)
  silkscreen extent -2.54,-1.14 2.54,1.14
NSO16_N [mm]
  oval 2.2x0.6 smd: 1(0,0) 2(0,-1.27) 3(0,-2.54) 4(0,-3.81) 5(0,-5.08) 6(0,-6.35) 7(0,-7.62) 8(0,-8.89) 9(4.8,-8.89) 10(4.8,-7.62) 11(4.8,-6.35) 12(4.8,-5.08) 13(4.8,-3.81) 14(4.8,-2.54) 15(4.8,-1.27) 16(4.8,0)
  silkscreen extent -0.12,-9.44 3.3,0.97
PCB焊接端子 [mm]
  round 2.5 hole 1.8: 1(0.5,0.1) 1(0.5,-7.1) 1(5.5,0.1)
  round 2.4 hole 1.8: 1(5.5,-7.1)
  silkscreen extent -1,-8.5 7,1.6
R_NET4 [mm]
  rect 0.6x1.016 smd: 1(0,0) 2(0.8,0) 3(1.6,0) 4(2.4,0) 5(2.4,1.778) 6(1.6,1.778) 7(0.8,1.778) 8(0,1.778)
  silkscreen extent -0.25,-1.02 2.67,1.27
SIP3 [mil]
  rect 70x70 hole 40: 1(0,0)
  round 70 hole 40: 2(100,0) 3(200,0)
  silkscreen extent -50,-50 250,50
so-8 [mil]
  oval 80x24 smd: 1(0,0) 2(0,-50) 3(0,-100) 4(0,-150) 5(220,-150) 6(220,-100) 7(220,-50) 8(220,0)
  silkscreen extent -5,-175 160,45
SOIC14_M [mm] "14-Pin Small Outline Integrated Circuit 1.27 mm Pitch, IPC Low Density"
  oval 2.5x0.7 smd: 1(-2.45,3.81) 2(-2.45,2.54) 3(-2.45,1.27) 4(-2.45,0) 5(-2.45,-1.27) 6(-2.45,-2.54) 7(-2.45,-3.81) 8(2.45,-3.81) 9(2.45,-2.54) 10(2.45,-1.27) 11(2.45,0) 12(2.45,1.27) 13(2.45,2.54) 14(2.45,3.81)
  silkscreen extent -2.57,-4.4 0.8,4.83, body extent -2,-4.38 2,4.38, height 1.75
SOIC16_L [mm]
  rect 2x0.6 smd: 1(0,0)
  oval 2x0.6 smd: 2(0,-1.27) 3(0,-2.54) 4(0,-3.81) 5(0,-5.08) 6(0,-6.35) 7(0,-7.62) 8(0,-8.89) 9(10,-8.89) 10(10,-7.62) 11(10,-6.35) 12(10,-5.08) 13(10,-3.81) 14(10,-2.54) 15(10,-1.27) 16(10,0)
  silkscreen extent -0.15,-9.71 8.4,1.17
SOIC-8 [mm]
  rect 1.7x0.51 smd: 1(0,0) 2(0,-1.27) 3(0,-2.54) 4(0,-3.81) 5(5.5,-3.81) 6(5.5,-2.54) 7(5.5,-1.27) 8(5.5,0)
  silkscreen extent 0.35,-4.44 3.82,0.94
sot96-1_n [mm]
  oval 2x0.6 smd: 1(-0.004,-0.008) 2(-0.004,-1.278) 3(-0.004,-2.548) 4(-0.004,-3.818) 5(4.996,-3.818) 6(4.996,-2.548) 7(4.996,-1.278) 8(4.996,-0.008)
  silkscreen extent -0.13,-4.41 3.6,0.97
SOT-23 [mm]
  rect 0.8x1.4 smd: 1(0,0) 2(1.9,0) 3(0.95,2.2)
  silkscreen extent -1.14,-1 2.54,3.2
SOT-223 [mm] "SOT-223/SC-73; 4 Leads; Body 6.7 x 7.3 mm, inc. leads (LxW max)"
  rect 1.1x1.75 smd: 1(-2.3,-3.275) 2(0,-3.275) 3(2.3,-3.275)
  rect 5x3 smd: 2(0,3.937)
  silkscreen extent -3.55,-2.66 3.35,1.85
TLP113 [mil]
  rect 80x24 smd: 1(-112.78,49.02) 2(-112.78,-0.98) 3(-112.78,-50.98) 4(107.22,-50.98) 5(107.22,-0.98) 6(107.22,49.02)
  silkscreen extent -119,-81 47,92
TP [mil]
  round 62 hole 32: 1(0,0)
  silkscreen extent -50,-50 50,50
TSSOP-20 [mm]
  rect 1.143x0.33 smd: 1(0.635,-0.432)
  oval 1.143x0.33 smd: 2(0.635,-1.082) 3(0.635,-1.732) 4(0.635,-2.382) 5(0.635,-3.032) 6(0.635,-3.682) 7(0.635,-4.332) 8(0.635,-4.982) 9(0.635,-5.632) 10(0.635,-6.282) 11(7.235,-6.282) 12(7.235,-5.632) 13(7.235,-4.982) 14(7.235,-4.332) 15(7.235,-3.682) 16(7.235,-3.032) 17(7.235,-2.382) 18(7.235,-1.732) 19(7.235,-1.082) 20(7.235,-0.432)
  silkscreen extent 2.27,-6.61 5.6,-0.11

## Part data
A AGND B DSP-AD GPIO IU IV PWM1 PWM2 PWM3 PWM4 PWM5 PWM6 TEMP TEMP1 TP20 TP21 TP22 TP23 VDC Z: library part 测试
A1: library part IB0505LS-W75
C1: "Capacito"
C2 C3 C4 C5 C11 C16 C17 C20 C21 C22 C23 C28 C30 C31 C39 C40 C41 C42 C43 C44 C45 C47 C48 C56 C57 C58 C59 C60 C61 C63 C64 C65 C66 C68 C69 C71 C72 C76 C77 C78 C79 C80 C82 C83 C86 C88 C90 C91 C92 C93 C94 C97 C98 C100 C101 C102 C103 C104 C105 C106 C107 C108 C109 C110 C111 C113 C193: library part Cap, "Capacito"
C18 C19 C62 C74 C114 C115 C119 C121: library part "Cap Pol1", "Polarized Capacitor (Radial)"
C32 C38 C67 C95 C116 C118 C122 C123 C128 C129 C130: library part "Cap Semi", "Capacitor (Semiconductor SIM Model"
C70 C73 C75: library part CAP, "Capacito"
C81 C84 C89: "Capacitor (Semiconductor SIM Model"
C96 C99: library part 2KWC2.S01_100nf_5
C112 C117 C120 C124 C125 C126 C127: library part "Cap Pol1", "Polarized Capacitor (Radia"
D3 D4 D8 D20: library part "Diode 1N4148", "High Conductance Fast Diode"
D6 D7 D9 D17 D18 D19: library part MMBD1203二三?
D10 D11: library part "D Zener", "Zener Diode"
D21 D22 D23 D33 D34 D35: library part "Diode 1N5408", "3 Amp Medium Power Silicon Rectifier Diode"
D24: library part DIODE, "Diode"
D25 D26: library part LED0, "Typical INFRARED GaAs LED"
D27 D28 D29 D30 D31 D32: library part "D ZENER2"
DC+ DC- U V W: "Header, 2-"
J6 J12 J17: "Header, 2-Pin"
J10 J11: "Receptacle Assembly, 9 Position, Right Angle"
J14: library part "Header 6", "Header, 6-Pin"
J16: "Header, 6-Pin"
L2: library part INDUCTOR1, "INDUCTOR"
L3 L4: library part INDUCTO
L5: library part T6
L6 L10: library part Inductor, "Inducto"
L7 L8: library part "Inductor Iron", "Magnetic-Core Inductor"
L9: library part Inductor, "Inductor"
N1: library part TL084
Q1 Q2 Q3: library part NPN, "NPN Bipolar Transistor"
R1 R2 R3 R4 R5 R7 R8 R9 R10 R11 R12 R13 R14 R16 R17 R18 R19 R20 R21 R22 R25 R26 R27 R29 R30 R31 R32 R33 R34 R35 R36 R37 R38 R39 R40 R41 R42 R44 R45 R46 R52 R53 R54 R55 R56 R57 R58 R59 R60 R61 R62 R63 R64 R65 R66 R67 R68 R69 R70 R71 R72 R73 R74 R75 R78 R79 R80 R81 R90: library part Res2, "Resisto"
R6 R15 R82 R83 R84: library part Res2, "Resistor"
R47: library part RES
R48 R49: library part R_NE
R50 R51: library part R_NET4
S1: library part SIP3
SPI: library part "Header 6", "Header, 6-P"
U3: library part TL
U4 U15: library part Component_1
U6 U9: library part ACS71
U7: library part LM258
U8: library part IC/VIPER12
U16: library part AT24C02, "U?"
U17: "+5V Powered, Multi-Channel RS-232 Driver/Receiver"
U18 U19: library part LM267
U20: library part LM1117
Z3 Z4: library part ZENER, "Zener Diode"

## Free pads (board coordinates)
  round 250 hole 160: 1(175,4919) 1(178,175) 1(7210,179) 1(7215,4904)
  round 60 hole 35: 8(262,4924) 8(267,174) 8(7297,184) 8(7302,4909) 9(85,4924) 9(90,174) 9(7120,184) 9(7125,4909) 10(103,4983) 10(108,233) 10(7138,243) 10(7143,4968) 11(173,5012) 11(178,262) 11(7208,272) 11(7213,4997) 12(244,4980) 12(249,230) 12(7279,240) 12(7284,4965) 13(116,4856) 13(121,106) 13(7151,116) 13(7156,4841) 14(175,4825) 14(179,86) 14(7210,85) 14(7215,4810) 15(240,4865) 15(245,115) 15(7275,125) 15(7280,4850)

## Via types
v1: diameter 25, hole 15, Top Layer to Bottom Layer, 193 vias
v2: diameter 35, hole 20, Top Layer to Bottom Layer, 140 vias
v3: diameter 25, hole 16, Top Layer to Bottom Layer, 32 vias
v4: diameter 50, hole 28, Top Layer to Bottom Layer, 23 vias
v5: diameter 28, hole 20, Top Layer to Bottom Layer, 1 vias

## Nets (pads, with @x,y where several pads share a name; then routed paths per layer and width w, separated by ;. In a path a pad name is that pad's centre, name@x,y a point inside that pad or via, vN(x,y) a via of type N, cw(c..) or ccw(c..) an arc to the next point about the centre after c; other vN are vias at no path point)
+5V1: C81.1 C84.1 C89.1 C119.1 C120.1 C122.2 L7.2 R57.2 R58.2 R65.2 R66.2 R70.2 R71.2 U3.1 U11.8 U12.8 U14.8 U18.4 | length 2028
  Top Layer w20: C120.1@4355,2050 4395,2010 U18.4@4515,2010 4550,2010 4575,1985 4575,1825 L7.2@4555,1805 ; C119.1@4390,1630 4355,1665 C122.2@4355,1830.63 ; v2(4430,1840) 4420.63,1830.63 C122.2@4355,1830.63 ; L7.2@4595,1845 L7.2@4555,1805 ; U3.1@4627.78,2635.98 v1(4699.02,2635.98) ; U14.8@4665,3205 4734.37,3205 R70.2@4780,3159.37 ; U12.8@4665,3682.5 4751.87,3682.5 R65.2@4785,3649.37 ; U11.8@4665,4150 4719.37,4150 R57.2@4785,4084.37 ; v1(4730,3810) 4735.63,3815.63 R58.2@4785,3815.63 ; v1(4770,3320) 4785,3335 R66.2@4785,3370.63 ; v1(4780,2835) R71.2@4780,2880.63 ; C122.2@4355,1830.63 4380.63,1805 L7.2@4555,1805
  Bottom Layer w20: U11.8@4660,4150 4784.37,4150 C81.1@4785,4150.63 ; U14.8@4665,3205 4699.37,3170.63 C89.1@4785,3170.63 ; U12.8@4665,3682.5 4786.87,3682.5 C84.1@4790,3685.63
+12V: C112.1 C115.1 J6.2 J16.1 L6.1 U19.7 | length 9817.5
  Top Layer w20: C115.1@300,4459 230,4389 230,4235 300,4165 300,3950 405,3845 740,3845 775,3810 775,1640 v2(912.5,1502.5) ; v2(3455,1265) 3455,805 3510,750 v2(3510,575) C112.1@3510,495 ; v2(4035,575) 4190,420 J16.1@4190,275
  Top Layer w30: U19.7@643.46,4360 580,4360 534.37,4405.63 353.37,4405.63 C115.1@300,4459 300,4505 585,4790 615,4820 1000,4820
  Top Layer w40: J6.2@1000,4970 1000,4820 1230,4590 L6.1@1524,4590
  Bottom Layer w20: v2(912.5,1502.5) 1157.5,1502.5 1325,1335 2660,1335 2695,1300 3250,1300 3265,1285 3435,1285 v2(3455,1265) ; v2(3510,575) v2(4035,575)
+12V2: C116.2 D33.1 L6.2 | length 191.5
  Top Layer w20: L6.2@1609.37,4590 1694.78,4590 D33.1@1699.96,4595.18 ; C116.2@1610.63,4490 L6.2@1610.63,4588.74
+15V1: C74.1 C75.1 C76.2 C77.2 C78.2 C79.2 C114.1 C118.2 D21.1 D23.2 D24.2 L2.2 R47.1 U4.16 U4.17 U18.7 Z4.2 | length 6215.6
  Top Layer w20: U18.7@4731.54,2110 4849.37,2110 C118.2@4850,2109.37 C118.2@4851,2110.37
  Top Layer w40: C114.1@4395,1281 4541,1281 L2.2@4610,1350 4955,1695 4955,2055 4900.63,2109.37 C118.2@4850,2109.37 ; 4485,1281 4605,1161 C74.1@4605,900 4605,700 ; R47.1@4600,530 4600,580 4607.99,587.99 Z4.2@4607.99,660 4605,662.99 4605,700 ; D21.1@4755.73,699.53 4605.47,699.53 4605,700 ; U4.17@5153.5,3652.5 U4.16@5153.5,3582.5 5278.13,3582.5 C75.1@5278.13,3517.5 ; C75.1@5285.63,3510 C79.2@5285.63,3590 ; v4(5427.5,3652.5) C77.2@5483.13,3652.5 ; v4(5430,3582.5) 5467.5,3582.5 ; D23.2@5491.31,3439.74 5495,3443.43 C78.2@5495,3570.71 C76.2@5495,3729.37 ; C76.2@5495.63,3730 C76.2@5495,3729.37 ; D24.2@5502.01,3820 5495,3812.99 C76.2@5495,3729.37
  Bottom Layer w40: L2.2@4610,1350 4955,1695 4955,2330 5315,2690 5315,3517.5 5380,3582.5 ; U4.16@5153.5,3582.5 5380,3582.5 ; U4.17@5153.5,3652.5 v4(5427.5,3652.5) ; v4(5430,3582.5) 5380,3582.5
/IPMFAULT: C2.2 C193.2 P1.29 R1.1 R90.1 U3.5 | length 4370.8
  Top Layer w10: v1(3940,1565) 3940,1740 4035,1835 4035,2335 4170,2470 4390,2470 4405,2485 ; 4395,2475 4405,2485 ; R1.1@4405,2530 4405,2485
  Top Layer w15: C193.2@4095,2675.63 4054.37,2675.63 4030,2700 4030,2766.24 4058.7,2794.94 4129.94,2794.94 4164.37,2829.37 R90.1@4164.37,2840
  Top Layer w20: C193.2@4095,2675.63 C2.2@4200,2675.63 4289.65,2675.63 4300,2685.98 U3.5@4407.78,2685.98 ; 4290,2675.98 4290,2629.9 4329.9,2590 4359.33,2590 R1.1@4405,2544.33 ; R1.1@4405,2530 R1.1@4405,2544.33 ; R1.1@4415,2530 R1.1@4404.37,2530 4405,2545 R1.1@4405,2544.33
  Bottom Layer w10: P1.29@1835,1665 1835,1610 1852.5,1592.5 3087.5,1592.5 3145,1535 3300,1535 3330,1565 v1(3940,1565)
/IPMFO: R2.1 U4.11 | length 843.8
  Top Layer w20: R2.1@4785,2650.63 4915.63,2650.63 5005,2740 5005,3140 5097.5,3232.5 U4.11@5153.5,3232.5
A: J16.5 R67.1 | length 1334.2
  Top Layer w20: v2(2965,785) 2985.84,805.84 R67.1@2985.84,845 ; J16.5@3590,275 3590,860 v2(3595,865)
  Bottom Layer w20: v2(2965,785) 3010,785 3090,865 3311.97,865 3324.47,877.5 3355.53,877.5 3368.03,865 v2(3595,865)
A+5V: C20.2 C41.2 C42.2 C57.2 C63.2 C117.1 L9.2 N1.4 R32.1 U4.1 U6.8 U7.8 U9.8 | length 6891.3
  Top Layer w20: v2(1350,4335) 1365,4320 1365,4300 ; C117.1@1365,4260 1365,4300 ; L9.2@1366.3,4145 C117.1@1366.3,4260 ; v2(1400,4335) 1365,4300 ; R32.1@1754.37,3965 1805,3965 ; v2(1805,3920) 1805,3965 ; C42.2@1857.3,3965 1805,3965 ; U7.8@1870,4075 1825,4075 1805.83,4055.83 1805.83,3965.83 1805,3965 ; N1.4@3193.54,4200 3255,4200 3300,4155 3300,3955.63 C41.2@3335.63,3920 3335.63,3975.63 v2(3350,3990) ; C63.2@6215,4525.63 6215,4442.78 U4.1@6216.5,4441.28 ; v1(6535.63,4370.63) 6535.63,4430.63 6554.37,4449.37 C20.2@6600,4449.37 6650.63,4449.37 6665,4435 U6.8@6665,4376.54 ; v1(6540,4010) 6540.63,4009.37 C57.2@6600,4009.37 6650.63,4009.37 6665,3995 U9.8@6665,3941.54
  Bottom Layer w20: v2(2555,4665) 2555,4680 2595,4720 3430,4720 3670,4960 6466.26,4960 6535.63,4890.63 6535.63,4465 ; U4.1@6216.5,4441.28 6511.91,4441.28 6535.63,4465 ; v1@6540,4009.37 v1(6540,4010) 6540,4366.26 v1(6535.63,4370.63) 6535.63,4465
AGND: A1.2 AGND.1 C1.1 C2.1 C20.1 C30.1 C31.1 C32.1 C38.1 C39.1 C40.1 C41.1 C42.1 C48.1 C57.1 C63.1 C64.1 C65.1 C66.1 C67.1 C68.1 C69.1 C71.1 C72.1 C80.2 C82.1 C83.2 C86.1 C88.2 C90.2 C91.2 C92.2 C93.2 C94.2 C95.2 C97.1 C105.2 C112.2 C115.2 C116.1 C117.2 C121.2 C123.1 C124.2 C125.2 C126.2 C128.1 C129.1 C130.1 C193.1 D6.1 D7.1 D9.1 D10.1 D11.1 D17.1 D18.1 D19.1 D35.1 J6.1 J12.2 J14.3 J16.2 N1.11 P1.7 P1.8 P1.9 P1.10 P1.157 P1.158 P1.159 P1.160 P1.161 P1.162 P1.163 P1.164 P1.189 P1.190 P1.191 P1.192 P1.217 P1.218 P1.219 P1.220 Q1.2 Q2.2 Q3.2 R7.2 R8.2 R16.2 R17.2 R19.1 R34.2 R35.2 R40.1 R44.1 R45.2 R46.2 R55.2 R56.2 R61.2 R62.2 R63.2 R64.2 R68.2 R69.2 R75.1 R78.1 R81.2 SPI.6 U3.4 U6.5 U7.4 U9.5 U10.10 U13.1 U13.8 U13.15 U15.2 U15.8 U19.2 U19.3 U19.6 U20.1 | length 19844.6
  Top Layer w15: v2(305,2150) R62.2@365.63,2150 ; v2@306.67,2476.67 R61.2@365.63,2476.67 ; Q2.2@624.8,2255 645,2275.2 v2(645,2330) ; Q1.2@624.8,2550 665,2590.2 v2(665,2635) ; v1(3810,3190) C80.2@3855.63,3190 ; v1@4200.63,2885.63 R68.2@4260,2885.63 ; v1@4200.63,3154.37 R69.2@4260,3154.37 ; v1@4200.63,3400.63 R63.2@4260,3400.63 ; v1@4200.63,3860.63 R55.2@4260,3860.63 ; v1@4200.63,4139.37 R56.2@4260,4139.37 ; R64.2@4260,3674.37 v1(4260,3730)
  Top Layer w20: C124.2@135,1975.24 155.24,1955 A1.2@285,1955 ; v2(1065,3225) R75.1@1135.63,3225 ; v2(1430,3990) C126.2@1430,3915.24 1479.76,3915.24 1495.63,3899.37 C130.1@1555,3899.37 ; v2(1475,4175) C117.2@1475,4259.76 ; v2(1560,1285) 1640,1285 1639.37,1285.63 C105.2@1685,1285.63 1775.63,1285.63 1790,1300 U15.8@1790,1345 ; C66.1@1675.63,4325 1675.63,4375.63 v2(1690,4390) ; C116.1@1689.37,4490 v2(1745,4490) ; C67.1@1754.37,4085 v2(1754.37,4139.37) ; R16.2@1860.63,4325 v2(1860.63,4384.37) ; C42.1@1936.04,3965 v2(1936.04,4030) ; U15.2@2090,1345 2090,1290 2105,1275 2175,1275 2185.63,1285.63 C97.1@2245,1285.63 ; U7.4@2090,4225 2130,4225 2145,4240 2145,4299.37 C32.1@2119.37,4325 ; v2(2110,4385) 2119.37,4375.63 C32.1@2119.37,4325 ; D10.1@2219.72,4370.26 2170.26,4370.26 2125,4325 C32.1@2119.37,4325 ; C97.1@2240,1290 v2(2290,1240) ; R8.2@2299.37,4085 v2(2350,4085) ; v2(2565,1205) C86.1@2565,1263.74 ; v2(2565,1430) 2565,1371.26 R78.1@2566.26,1370 ; R81.2@2644.37,635 v2(2710,635) ; v2(2710,900) 2745,865 ; v2(2720,1370) C83.2@2780.63,1370 2780.63,1295.63 2791.26,1285 U13.1@2825.51,1285 ; v2(2730,4445) 2750,4465 D11.1@2800,4465 ; v2(2750,3920) R34.2@2795.63,3920 ; C94.2@2776.05,845 C94.2@2765,845 ; R17.2@2795.63,4240 2795.63,4300.63 v2(2800,4305) ; U13.8@2825.51,935 2760,935 2745,920 2745,865 ; C95.2@2854.37,740 v2(2920,740) ; R45.2@2874.37,4025 2921.5,4025 ; v2(2921.5,4066.5) 2921.5,4025 ; v2(2930,1235) U13.15@3014.49,1235 ; v2(2930,4380) 2970.63,4339.37 R7.2@2970.63,4348 ; C38.1@2970.63,4134 2970.63,4050.63 2945,4025 2921.5,4025 ; Q3.2@3059.8,650 v2(3125,650) ; C90.2@3274.37,845 3335,845 v2(3340,840) ; C93.2@3274.37,950 3317.5,950 v2(3340,972.5) ; C92.2@3274.37,1370 v2(3340,1370) ; v2(3300,4235) 3335,4200 N1.11@3386.46,4200 ; v2(3330,495) C112.2@3399.76,495 ; v2(3340,1105) 3329.37,1105 C91.2@3274.37,1160 C88.2@3274.37,1265 3301.87,1237.5 v2(3340,1237.5) ; C41.1@3414.37,3920 v2(3414.37,3989.37) ; R35.2@3594.37,4027 3594.37,4034.37 v2(3645,4085) ; R19.1@3594.37,4241 v2(3654,4241) ; C48.1@3594.37,4348 v2(3648,4348) ; U10.10@3681.78,2860 3695,2860 v1(3715,2840) ; C82.1@3739.37,3190 v1(3810,3190) ; R46.2@3774.37,4027 3803,4027 3830,4000 v2(3830,3985) ; C193.1@4095,2754.37 C2.1@4200,2754.37 4269.37,2754.37 4287.76,2735.98 U3.4@4407.78,2735.98 ; v1@4140,2520.63 C1.1@4200,2520.63 ; C63.1@6215,4604.37 6265.63,4604.37 v1(6270,4600) ; C72.1@6330,4525.63 v1(6330,4475) C71.1@6330,4429.37 R44.1@6420,4429.37 v1(6420,4475) ; v1(6595,4305) 6595,4335 ; C57.1@6600,3930.63 6600,3910 6635,3875 6840,3875 6845,3870 v4(6890,3870) ; C20.1@6600,4370.63 6600,4340 6645,4295 v4(6890,4295) ; U9.5@6815,3941.54 6848.46,3941.54 6859.37,3930.63 C64.1@6890,3930.63 ; U6.5@6815,4376.54 6820.91,4370.63 C40.1@6890,4370.63 ; 2745,865 C94.2@2765,845 ; 2745,865 2756.05,865 2765,856.05 C94.2@2765,845
  Top Layer w30: C125.2@230,3520.24 C128.1@230,3620.63 309.37,3620.63 v4(325,3605) ; D35.1@454.82,3949.96 v4(560,3950) ; U20.1@525.55,3703.94 601.06,3703.94 645,3660 C129.1@645,3614.37 ; U19.6@643.46,4410 U19.3@860,4410 ; v2(750,4360) U19.2@860,4360
  Top Layer w40: v4(1010,3955) 1010,4034.76 1054.76,4034.76 1085.63,4065.63 C123.1@1135,4065.63 ; v4(5760,4815) 6070,4815 6215,4670 C63.1@6215,4604.37 ; v4(6890,3870) C64.1@6890,3930.63 ; v4(6890,4295) C40.1@6890,4370.63
  GND w40: 3680,4955 6720,4955 6845,4830 6845,4325 ; v4(6890,3870) 6845,3915 6845,4325 ; v4(6890,4295) 6875,4295 6845,4325
  Bottom Layer w10: R40.1@2255,2314.37 2305,2364.37 v1(2305,2375) ; D7.1@2430,2228.33 2430,2245 v1(2470,2285) ; D18.1@2430,2431.67 2441.67,2431.67 v1(2485,2475) ; D9.1@2430,2635 2440,2635 v1(2485,2680) ; D19.1@2620,2228.33 2628.33,2220 v1(2680,2220) ; D6.1@2620,2431.67 2621.67,2430 2660,2430 v1(2675,2445) ; D17.1@2625,2630 D17.1@2620,2635 2640,2635 2660,2655 v1(2660,2680) ; v1(2900,2212.86) 2943.49,2212.86 C65.1@2950.63,2220 ; v1(2900,2314.29) C31.1@2944.92,2314.29 ; v1(2900,2415.71) C30.1@2946.34,2415.71 ; v1(2900,2517.14) C69.1@2947.77,2517.14 ; v1(2900,2720) C39.1@2950.63,2720 ; v1@2901.43,2620 C68.1@2950.63,2620
  Bottom Layer w20: v2(3295,4795) 3310,4780 3402.57,4780 3642.57,5020 3721.97,5020 3779.47,5077.5 3810.53,5077.5 3838.03,5050 6524.85,5050 6564.85,5010 v2(6665,5010)
  Bottom Layer w40: 2775,4645 3560,4645 3705,4790 5735,4790 v4(5760,4815)
  other v1: 2216,1935.5 2252,1935.5 2289,1935.5 2326,1935.5 2362,1935.5 918,2218 1026,2218 1062,2218 1099,2218 1136,2218 1172,2218 1211,2218 1247,2218 1284,2218 1321,2218 1357,2218 1957,2241 918,2254 1957,2277 918,2291 1957,2314 918,2328 1957,2351 918,2364 1957,2387 918,2403 918,2439 918,2476 1621,2483 1657,2483 1694,2483 1731,2483 1767,2483 918,2513 4140,2520 918,2549 918,2588 2900,2618.57 918,2624 918,2661 918,2698 3122,2731 918,2734 4305,2735.98 3122,2767 3122,2804 3122,2841 3122,2877 4200,2885 3122,3131 4200,3155 923,3158 3122,3167 923,3194 3122,3204 923,3231 3122,3241 923,3268 1741,3273 1777,3273 1814,3273 1851,3273 1887,3273 3122,3277 923,3304 2286,3373 2322,3373 2359,3373 2396,3373 2432,3373 4200,3400 4200,3860 4200,4140
  other v2: 305,2475 720,4410 775,4410
  other v4: 615,3695
ANOLOG_0-10V: D10.2 J14.2 R12.1 | length 1179.9
  Top Layer w20: R12.1@2299.37,4200 2330,4200 2408.69,4278.69 D10.2@2408.69,4360 ; D10.2@2408.69,4370.26 2408.69,4458.69 2420,4470 v2(2420,4715)
  Bottom Layer w20: J14.2@1850,4805 1930,4725 2410,4725 v2(2420,4715)
AVDD: C126.1 C130.2 D6.2 D7.2 D9.2 D17.2 D18.2 D19.2 L10.2 | length 3296.8
  Top Layer w6: 1460,3625 1460,3440 1510,3390 ; 1505,3625 1509.75,3620.25 1509.75,3395.25 ; 1510,3395 1560,3445 1560,3600 1535,3625
  Top Layer w20: L10.2@1334.37,3920 1334.37,3865.63 v2(1350,3850) 1350,3835 1380,3805 C126.1@1430,3805 ; v2(1510,2660) 1510,3390 ; 1535,3625 1505,3625 1460,3625 1450,3625 1430,3645 C126.1@1430,3805 ; C130.2@1555,3820.63 1505.63,3820.63 1490,3805 C126.1@1430,3805
  Bottom Layer w10: v1(2335,2290) 2355.2,2269.8 D7.2@2355.2,2228.33 ; v1(2340,2490) 2355.2,2474.8 D18.2@2355.2,2431.67 ; v1(2355,2580) 2355.2,2580.2 D9.2@2355.2,2635 ; v1(2495,2170) 2495,2178.14 D19.2@2545.2,2228.33 ; v1(2495,2425) 2501.67,2431.67 D6.2@2545.2,2431.67 ; v1(2495,2630) 2540.2,2630 D17.2@2545.2,2635
  Bottom Layer w20: v2(1510,2660) 2270,2660 2295,2635 D9.2@2355.2,2635
B: J16.4 R72.1 | length 1236.3
  Top Layer w20: R72.1@3274.37,1055 3320,1055 v2(3330,1045) ; v2(3710,1055) 3740,1025 J16.4@3740,275
  Bottom Layer w20: v2(3330,1045) 3340,1055 v2(3710,1055)
CSC: R21.2 R22.2 R31.2 U4.7 U4.8 U4.9 | length 1730.8
  Top Layer w20: R31.2@5364.37,3110 5410,3110 5615,3315 6195,3315 6215,3295
  Top Layer w100: 6215,3295 6216.5,3293.5 ; U4.7@6216.5,3310 6216.5,3293.5 ; 6333.33,3227.5 U4.8@6216.5,3227.5 ; R21.2@6355.35,3170 6216.5,3170 ; 6359.37,3113.72 U4.9@6216.5,3113.72 6216.5,3170 ; R22.2@6373.09,2997.74 R21.2@6373.09,3187.74 ; 6216.5,3170 U4.8@6216.5,3227.5 ; U4.8@6216.5,3227.5 6216.5,3293.5
D+5V: A1.1 C80.1 C121.1 C123.2 C124.1 C128.2 D25.1 D26.1 J17.1 L8.2 L9.1 P1.1 P1.2 P1.3 P1.4 P1.5 P1.6 P1.81 P1.82 R48.5 R48.6 R48.7 R48.8 R49.5 R49.6 R49.7 R49.8 R74.2 R79.2 SPI.1 U10.20 U19.4 U20.3 | length 16510.7
  Top Layer w15: 40,2270 70,2240 D26.1@120,2240 ; 40,2470 70,2440 D25.1@120,2440 ; v1(3795,3385) R48.8@3840,3385 R48.7@3871.5,3385 R48.6@3902.99,3385 R48.5@3934.49,3385 3959.74,3385 ; C80.1@3934.37,3190 3960,3190 3975,3175 ; U10.20@3939.84,3093 3963,3093 3975,3105 3975,3175 ; 3960,3385.26 3959.74,3385 ; v1(4005,3090) 4005,3145 3975,3175 ; R49.5@4079.49,3385 R49.6@4047.99,3385 R49.7@4016.5,3385 R49.8@3985,3385 3959.74,3385
  Top Layer w20: 39.57,3765 105.2,3699.37 C128.2@230,3699.37 ; L8.2@855,4090 855,3935 1135,3655 P1.82@1135,3550 P1.81@1135,3500 1135,3315.63 R74.2@1135.63,3315 ; v2(1235,1505) P1.5@1235,1665 ; J17.1@3225,110 3225,225 3245,245 3245,660.63 3274.37,690 R79.2@3274.37,735 3290,735 v2(3335,780) ; v2(3440,1417.5) 3525,1332.5 v2(3525,815)
  Top Layer w30: 40,1930.45 40,2270 40,2470 40,2770 ; 40,3509.37 40,2770 ; SPI.1@110,2740 70,2740 40,2770 ; C128.2@230,3699.37 234.57,3703.94 U20.3@344.45,3703.94 ; U19.4@860,4460 980,4460 C121.1@1035,4405 1035,4225 1010,4200 1010,4145
  Top Layer w40: 40,1930.45 39.57,1930.88 ; v4(80,4215) 39.57,4174.57 39.57,3765 39.57,1930.88 ; A1.1@285,1855 175,1855 165,1865 105,1865 39.57,1930.43 39.57,1930.88 ; L8.2@855,4090 900,4090 955,4145 1010,4145 L9.1@1260,4145
  VCC w20: 1105,3750 1135,3720 P1.82@1135,3550 P1.81@1135,3500
  VCC w40: 795,1870 1060,1870 1185,1745 P1.4@1185,1715
  Bottom Layer w15: v2(3440,1417.5) 3917.5,1417.5 3980,1480 3980,3065 v1(4005,3090)
  Bottom Layer w20: v2(1235,1505) 1365,1375 2671.97,1375 2704.47,1407.5 2735.53,1407.5 2740.53,1402.5 3304.47,1402.5 3319.47,1417.5 v2(3440,1417.5) ; v2(3335,780) 3490,780 v2(3525,815)
  Bottom Layer w30: v4(80,4215) 455,4215
  Bottom Layer w40: A1.1@285,1855 1080,1855 1185,1750 P1.4@1185,1715 ; 455,4215 845,4215 C121.1@1035,4405 ; 1135,1690 1185,1690 ; 1135,1690 P1.1@1135,1665 P1.3@1185,1665 ; 1135,1690 P1.2@1135,1715 P1.4@1185,1715 ; P1.3@1185,1665 P1.5@1235,1665 1235,1690 ; P1.3@1185,1665 1185,1690 ; 1185,1690 1235,1690 ; 1185,1690 P1.4@1185,1715 ; P1.4@1185,1715 1210,1715 ; 1210,1715 1235,1690 ; 1210,1715 P1.6@1235,1715 1235,1690
DC_BUS: C18.1 C19.1 DC+.1 R15.1 U4.3 U8.5 U8.6 U8.7 U8.8 | length 8556
  Top Layer w20: R15.1@6040,4165 6045,4160 v1(6045,4100)
  Top Layer w40: U8.5@5285.47,774.53 U8.6@5285.47,874.53 U8.7@5285.47,974.53 U8.8@5285.47,1074.53 6265.47,1074.53 6461.85,878.15
  Top Layer w100: C19.1@6461.85,760 6461.85,878.15
  VCC w100: C18.1@5911.85,2175 6850,2175 ; 6040,2770 6040,2985 ; U4.3@6216.5,4127.5 6122.5,4127.5 6040,4045 6040,2985 ; C19.1@6461.85,760 6461.85,1481.85 6902.21,1922.21 DC+.1@7090.47,1922.21 ; DC+.1@7090.47,2119.07 6905.94,2119.07 6850,2175 ; DC+.1@7090.47,2125.31 7373.94,2125.31 DC+.1@7373.94,2119.07 7373.94,1928.46 7090.47,1928.46 7090.47,1995 ; 7368.94,1995 7090.47,1995 ; 7368.94,2055 7090.47,2055 7090.47,1995 ; 6040,2985 6850,2175
DI_1: C86.2 J17.2 R78.2 U13.2 | length 2081.1
  Top Layer w20: v2(2505,740) 2505,1285 2532.56,1312.56 2642.56,1312.56 2645,1315 ; R78.2@2645,1370 2645,1315 ; U13.2@2825.51,1235 2720,1235 2690,1265 C86.2@2645,1265 2645,1315 ; v2(3030,590) 3075,545 J17.2@3075,110
  Bottom Layer w20: v2(2505,740) 2555,690 2930,690 v2(3030,590)
  other v2: 2705,1250
DSP-5V/IO_OUT: J16.6 Q3.3 R79.1 | length 902.1
  Top Layer w10: 3165.63,735 R79.1@3194.02,736.61
  Top Layer w20: Q3.3@3022.4,736.61 R79.1@3194.02,736.61 ; v2(3195,280) R79.1@3195,735
  Bottom Layer w20: v2(3195,280) 3435,280 J16.6@3440,275
GND: C18.2 C19.2 C21.1 C43.1 C56.1 C58.1 C59.1 C60.1 C61.1 C74.2 C75.2 C76.1 C77.1 C78.1 C79.1 C81.2 C84.2 C89.2 C114.2 C118.1 C119.2 C120.2 C122.1 D22.1 D23.1 D24.1 D34.1 DC-.1 R6.1 R21.1 R22.1 R47.2 U4.15 U11.5 U12.5 U14.5 U18.2 U18.3 U18.6 Z4.1 | length 8932.6
  Top Layer w20: C122.1@4355,1909.37 v2(4430.63,1909.37) ; C120.2@4355,2160.24 4405.24,2110 U18.2@4515,2110 ; U18.3@4515,2060 U18.2@4515,2110 ; v2(4585,2110) U18.2@4515,2110 ; U18.6@4731.54,2060 4775,2060 4804.37,2030.63 C118.1@4850,2030.63 v2(4850,1960) ; v2(4850,2185) 4890,2225 D34.1@4890.04,2274.82 D34.1@4890.04,2274.82 ; C61.1@5364.37,3190 C60.1@5364.37,3270 C59.1@5364.37,3350 ; C79.1@5364.37,3590 C75.2@5364.37,3510 ; C56.1@5364.37,3670 C43.1@5364.37,3750 ; C61.1@5369.37,3185 v1(5425,3185) ; C60.1@5369.37,3265 v1(5425,3265) ; C58.1@5369.37,3425 v1(5425,3425) ; v1(5425,3350) C59.1@5364.37,3350 ; v1(5425,3500) 5415,3510 C75.2@5364.37,3510 ; v1(5425,3750) C43.1@5364.37,3750 ; v1(5425,3825) 5369.37,3825 C21.1@5364.37,3830 C43.1@5364.37,3750 ; D24.1@5627.99,3820 5820,3820 5855,3855 v1(5855,4085) R6.1@5855,4165 ; C59.1@5364.37,3350 C58.1@5364.37,3430 C75.2@5364.37,3510
  Top Layer w40: C114.2@4395,1155 4395,1045 4465,975 C74.2@4465,900 4482.01,882.99 Z4.1@4482.01,660 4482.01,541.69 R47.2@4493.7,530 4486.69,522.99 4460,522.99 v4(4415.47,567.52) ; v4(4810.47,799.53) 4835.21,824.27 D22.1@4835.21,884.24 ; C79.1@5364.37,3590 C56.1@5364.37,3670 ; D24.1@5627.99,3820 5627.99,3752.99 5604.37,3729.37 5573.74,3729.37 5573.74,3680 ; v4(5680,3555) 5645,3555 5629.29,3570.71 C78.1@5573.74,3570.71 ; v4(5680,3690) 5670,3680 5573.74,3680 ; D23.1@5680.28,3439.74 5630.26,3439.74 5573.74,3496.26 C78.1@5573.74,3570.71 ; C78.1@5573.74,3570.71 5573.74,3680
  Top Layer w100: R21.1@6609.31,3187.74 R22.1@6609.31,2997.74 6609.31,2775 6609.31,1726.48 DC-.1@7077.97,1257.81
  Top Layer w140: v4@5465,2775 6609.31,2775
  GND w100: C19.2@6068.15,760 6068.15,928.15 ; DC-.1@7095.47,1073.46 DC-.1@7373.94,1073.46 7378.94,1073.46 7378.94,1205 ; 7095.47,1135 7373.94,1135 ; 7095.47,1205 7378.94,1205 ; DC-.1@7095.47,1270.31 DC-.1@7373.94,1270.31 7378.94,1270.31 7378.94,1205
  Bottom Layer w20: v2(4685,3290) 4744.37,3290 C89.2@4785,3249.37 ; v2@4695,3765 v2(4695.63,3764.37) C84.2@4790,3764.37 ; v2(4695.63,4229.37) C81.2@4785,4229.37
  other v4: 4270,2280 5450,2720 5520,2720 5520,2775 5450,2780 5450,2835 5520,2835
GND_CAN: A1.4 C96.1 C98.2 C99.1 C102.2 C103.1 C106.1 C107.1 C108.1 C109.2 C113.1 C127.2 D27.2 D28.2 D31.1 D32.1 J10.3 J10.10 J10.11 J11.5 J11.10 J11.11 U15.9 U15.15 U16.2 U16.8 U17.15 | length 2213.2
  Top Layer w20: v2(50,1490) 105,1435 C102.2@105,1444.37 154.37,1444.37 195,1485 265,1485 275,1475 U17.15@275,1418.98 ; C127.2@135,1655.24 234.76,1755 A1.4@285,1755 ; v2(150,770) D31.1@150,845.02 ; v2@270.63,859.37 C96.1@335,859.37 ; v2(355,975) 365,975 400.63,1010.63 C109.2@445,1010.63 ; v2(525,905) 532.7,905 C99.1@578.33,859.37 ; v2(885,790) D32.1@885,855.54 ; v2(1289.74,949.74) D28.2@1289.74,1028.69 ; D27.2@1290.26,551.31 v2(1406.31,551.31) ; v2(1475,735) 1495,715 C108.1@1540.63,715 ; v2(1540,510) 1540.63,510.63 C107.1@1540.63,585 ; v2(1680,870) C106.1@1680,930.63 ; C106.1@1685,935.63 1774.33,935.63 U15.9@1790,951.3 ; U16.2@2084.7,795.15 2084.7,745.3 v2(2110,720) ; U15.15@2090,951.3 2090,987.99 2132.01,1030 v2(2140,1030) 2149.33,1020.67 2208.7,1020.67 C98.2@2215,1014.37 ; U16.8@2134.7,598.3 2134.7,644.7 2150.63,660.63 C103.1@2210,660.63 ; v2(2210,600) C103.1@2210,660
  Bottom Layer w20: v4(50,1575) 50,1610 89.37,1649.37 C113.1@135,1649.37 240.63,1755 A1.4@285,1755
  other v2: 270,860
ICU: R39.1 U6.7 | length 4404.9
  Top Layer w20: R39.1@3774.37,4134 3774.37,4219.37 3795,4240 v2(3795,5040) ; U6.7@6715,4376.54 6715,4445 v1(6760,4490)
  Bottom Layer w20: v2(3795,5040) 3815,5020 6512.43,5020 6760,4772.43 v1(6760,4490)
ICV: R42.1 U9.7 | length 5801.9
  Top Layer w20: v2(2680,4760) 2650,4730 2650,4200 2715,4135 R42.1@2795.63,4135 ; U9.7@6715,3941.54 v5(6715,4005)
  Bottom Layer w20: v2@2680,4750 3415,4750 3655,4990 6500,4990 6715,4775 v5(6715,4005)